# Altium PCB ZYNQ-HS-DEV-PCB.PcbDoc (part 1 of 10)
Units mm, origin at the board's own origin, x right, y up, seen from the top; angles counter-clockwise.
Board outline 125.25 x 111 mm, 10 copper layers (S1 (SIG), S2 (GND), S3 (SIG), S4 (GND), S5 (PWR), S6 (SIG), S7 (GND), S8 (SIG), S9 (GND), S10 (SIG)), stack 1.597 mm thick; 539 components, 408 nets, 2443 pads, 876 vias.
Unrouted connection lines stored in the file: 1310.
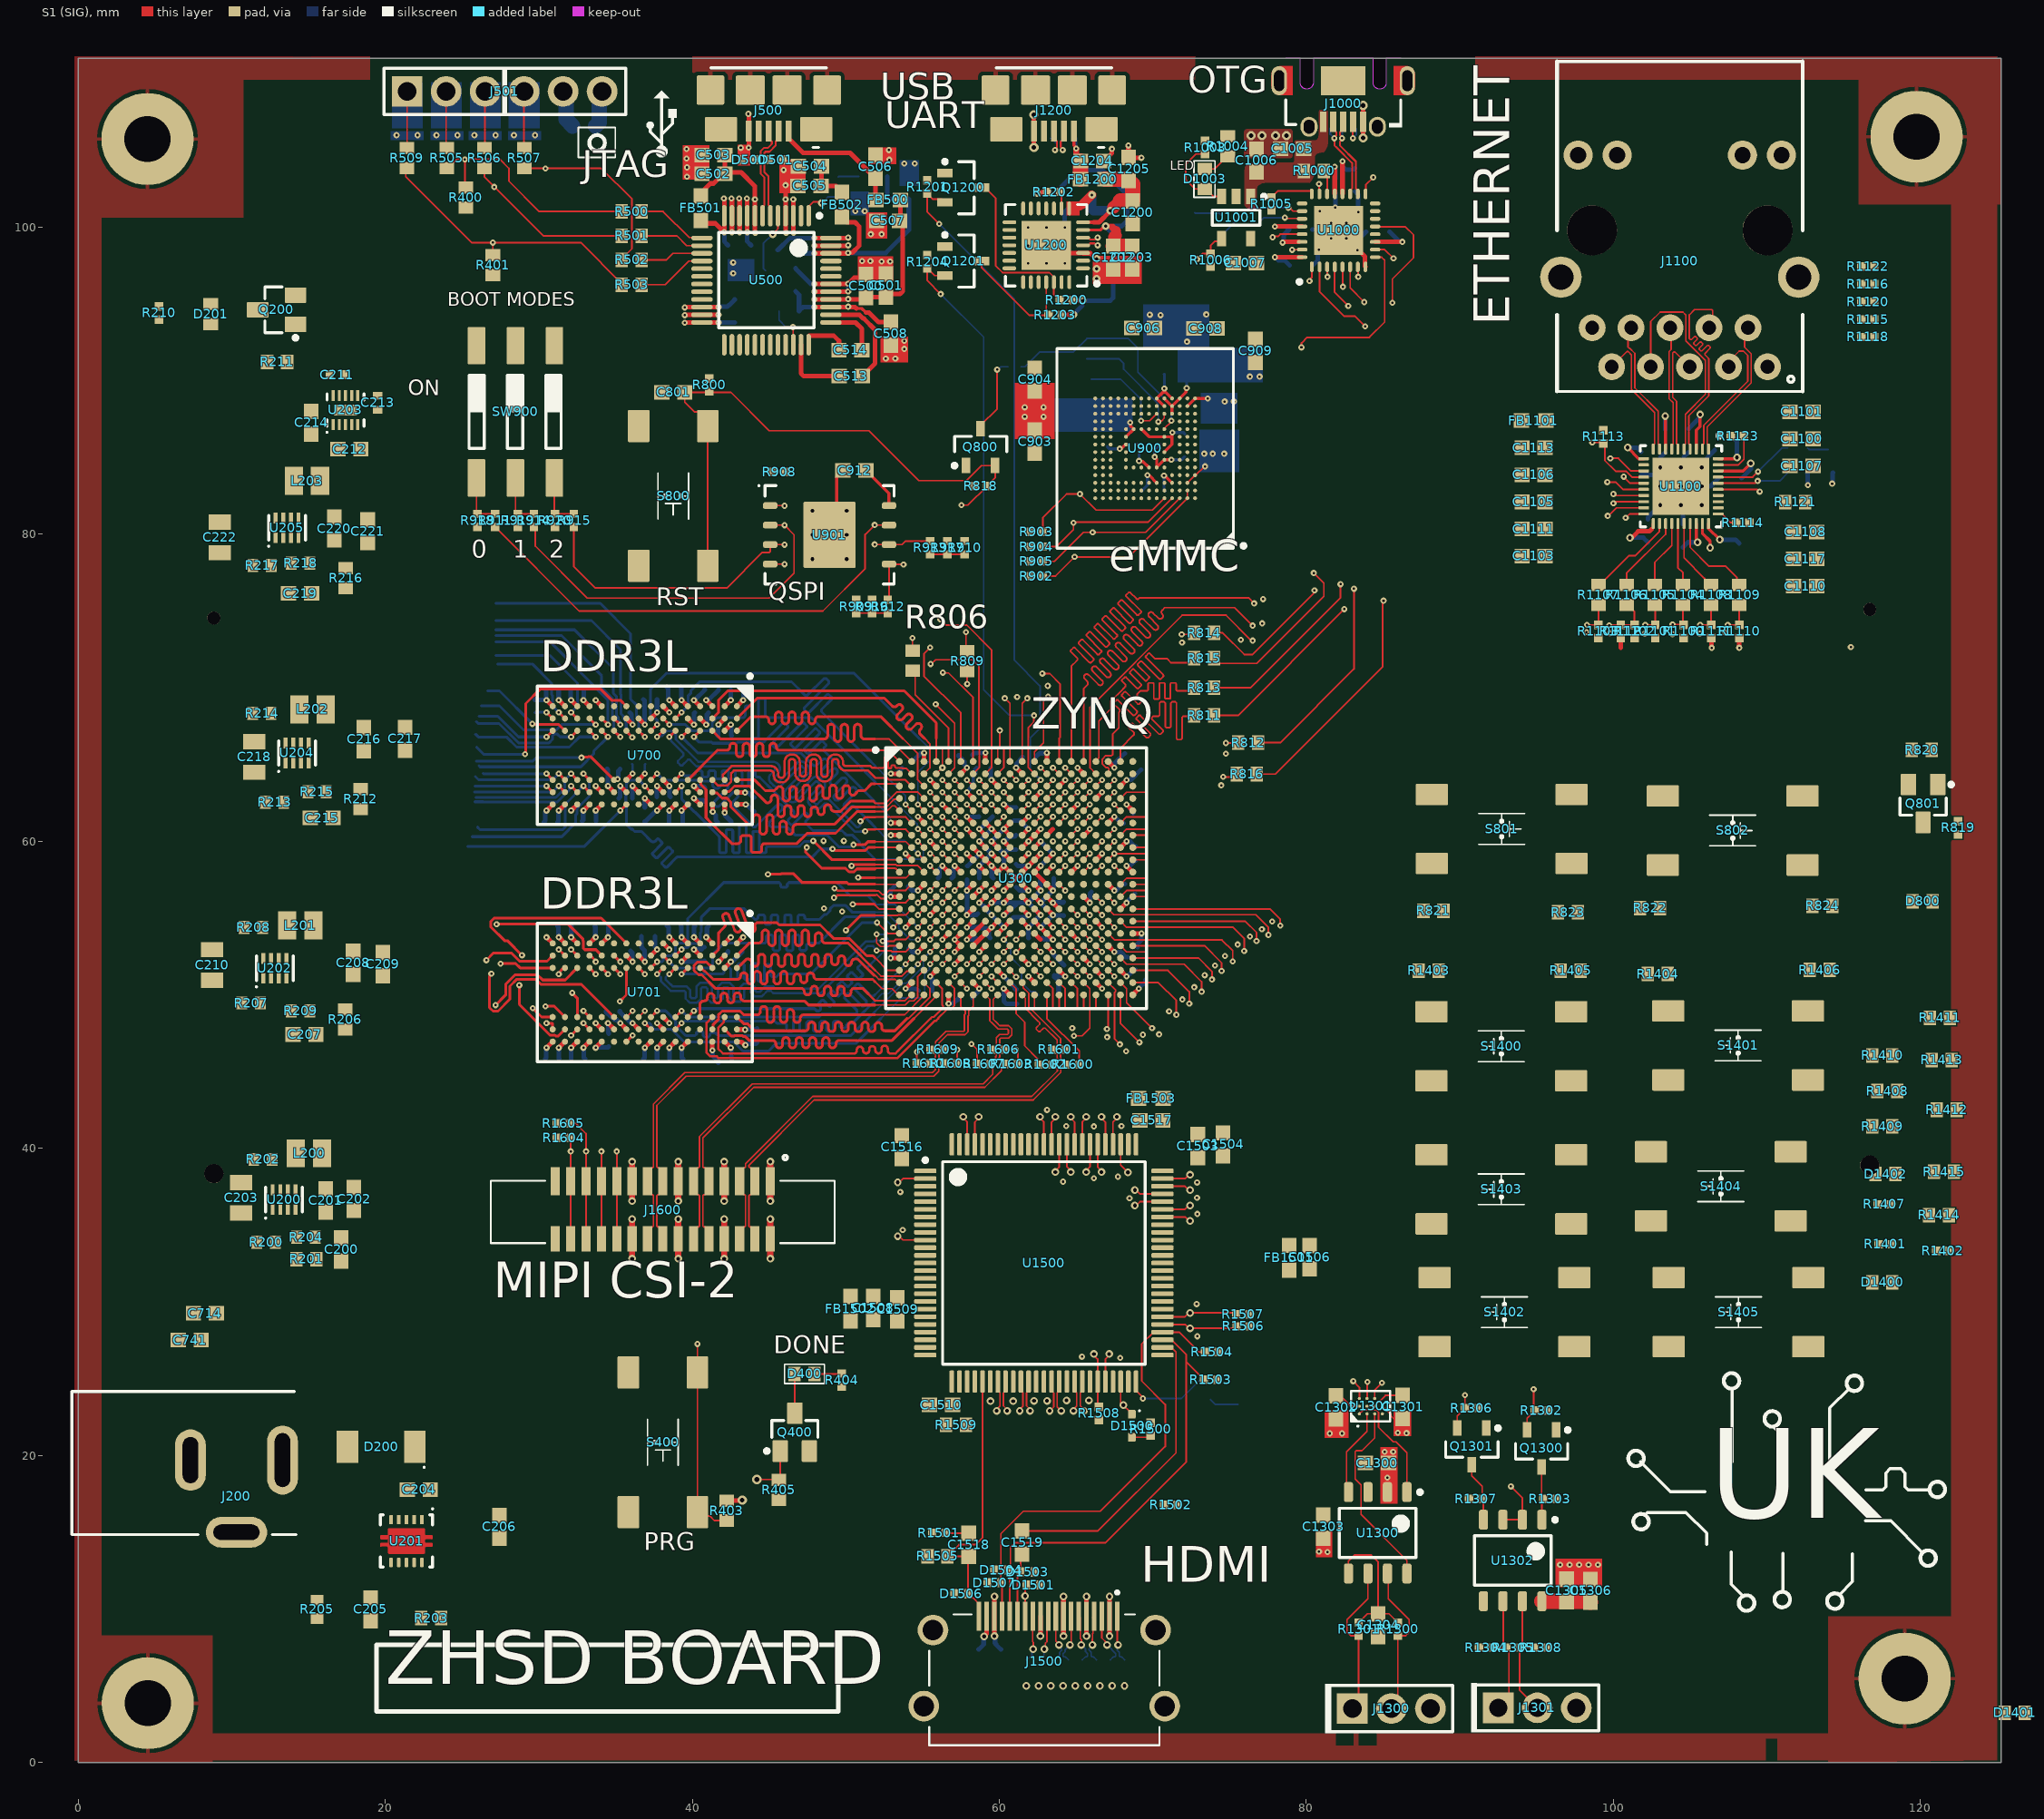
[diagram p0: S1 (SIG) view]
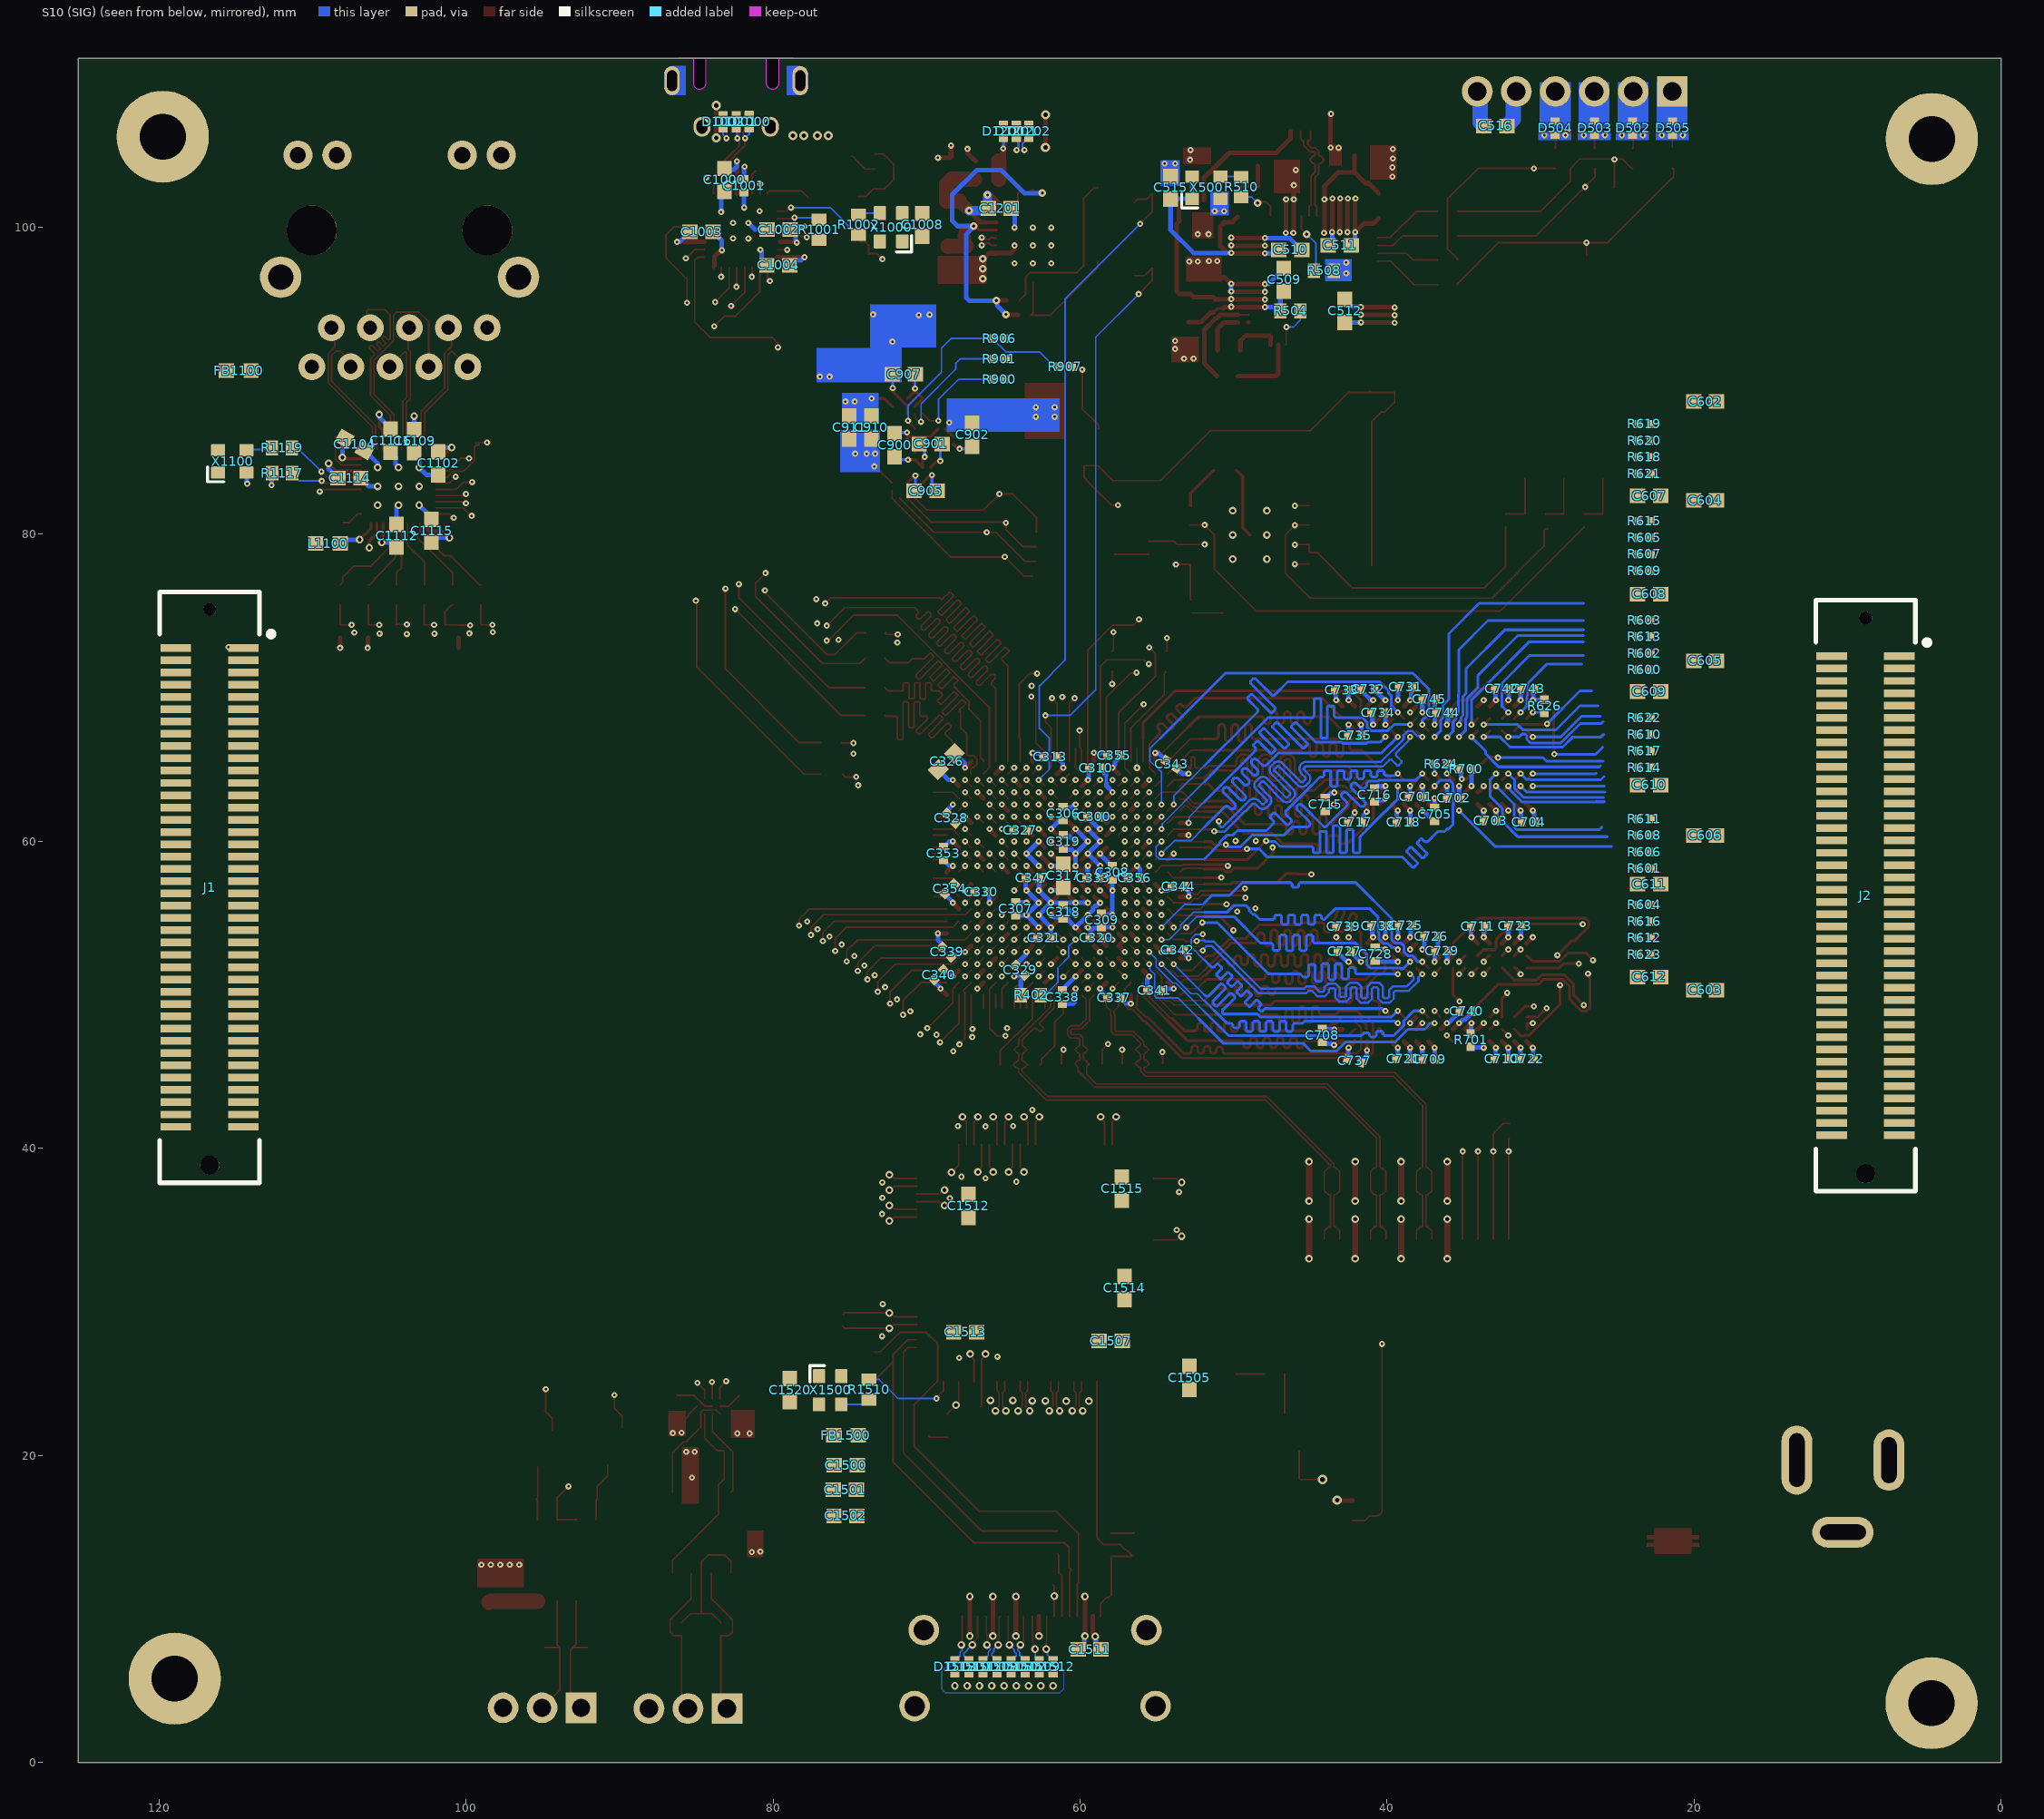
[diagram p1: S10 (SIG) view, seen from below]
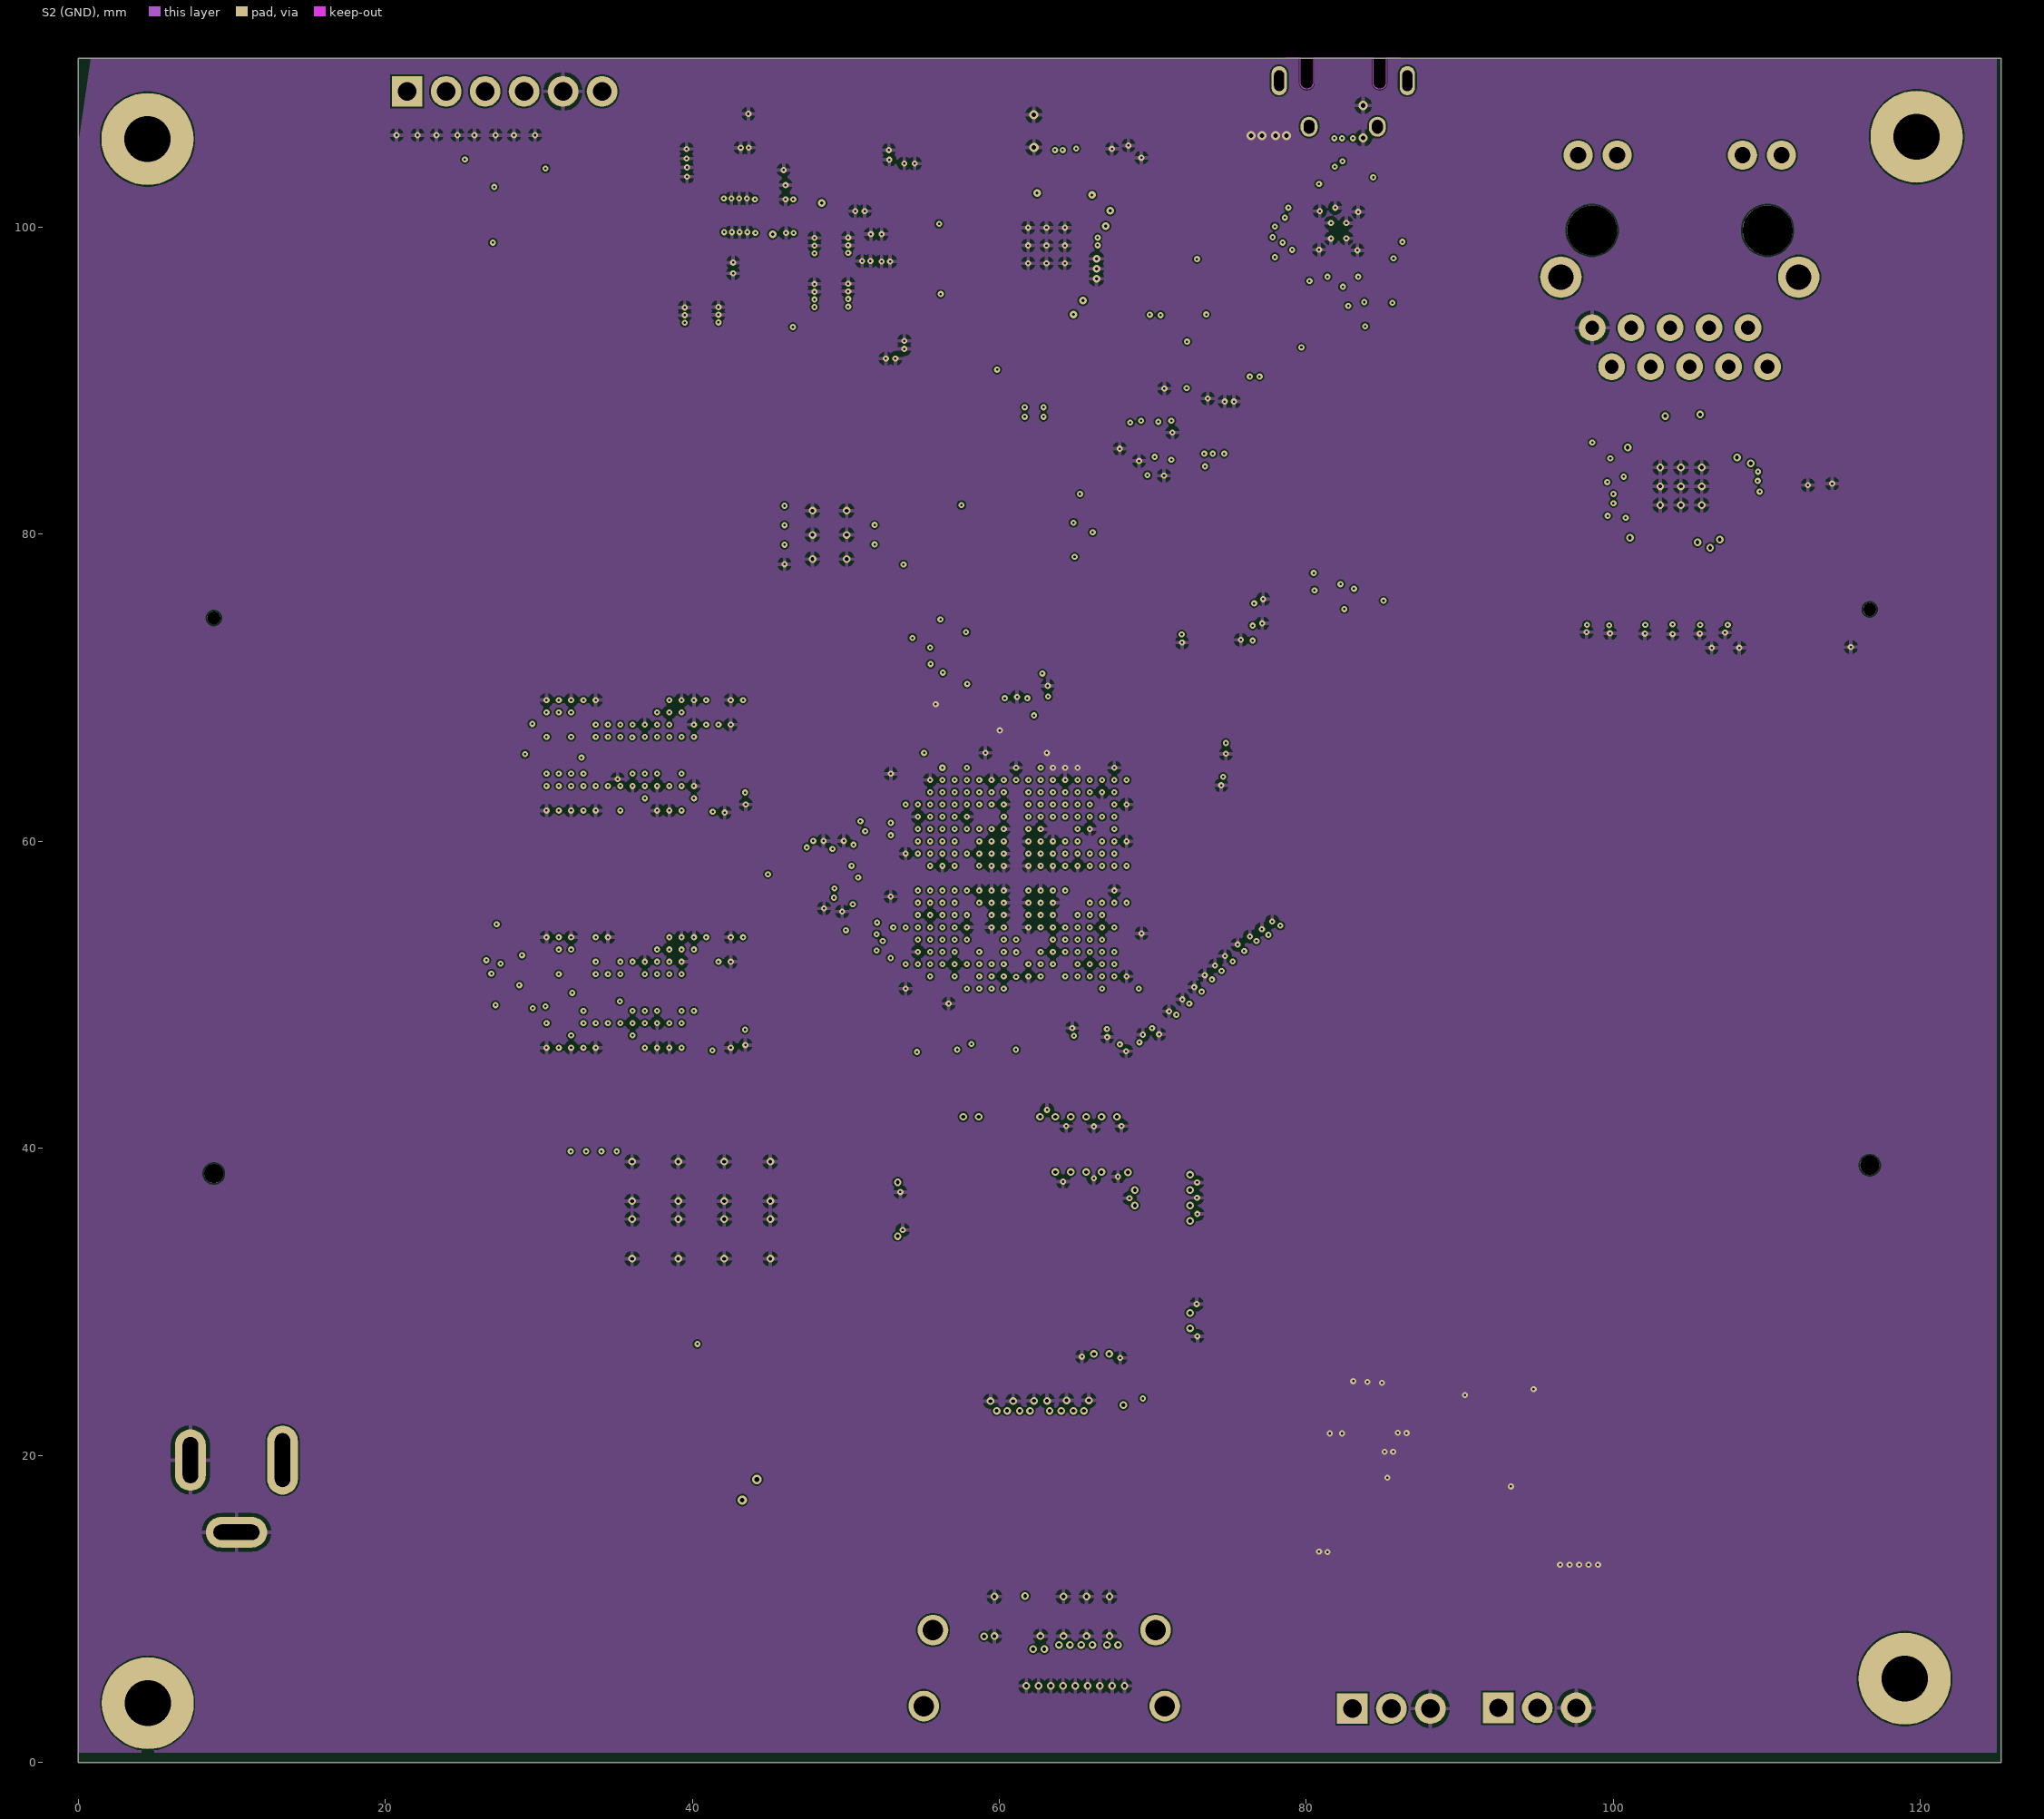
[diagram p2: S2 (GND)]
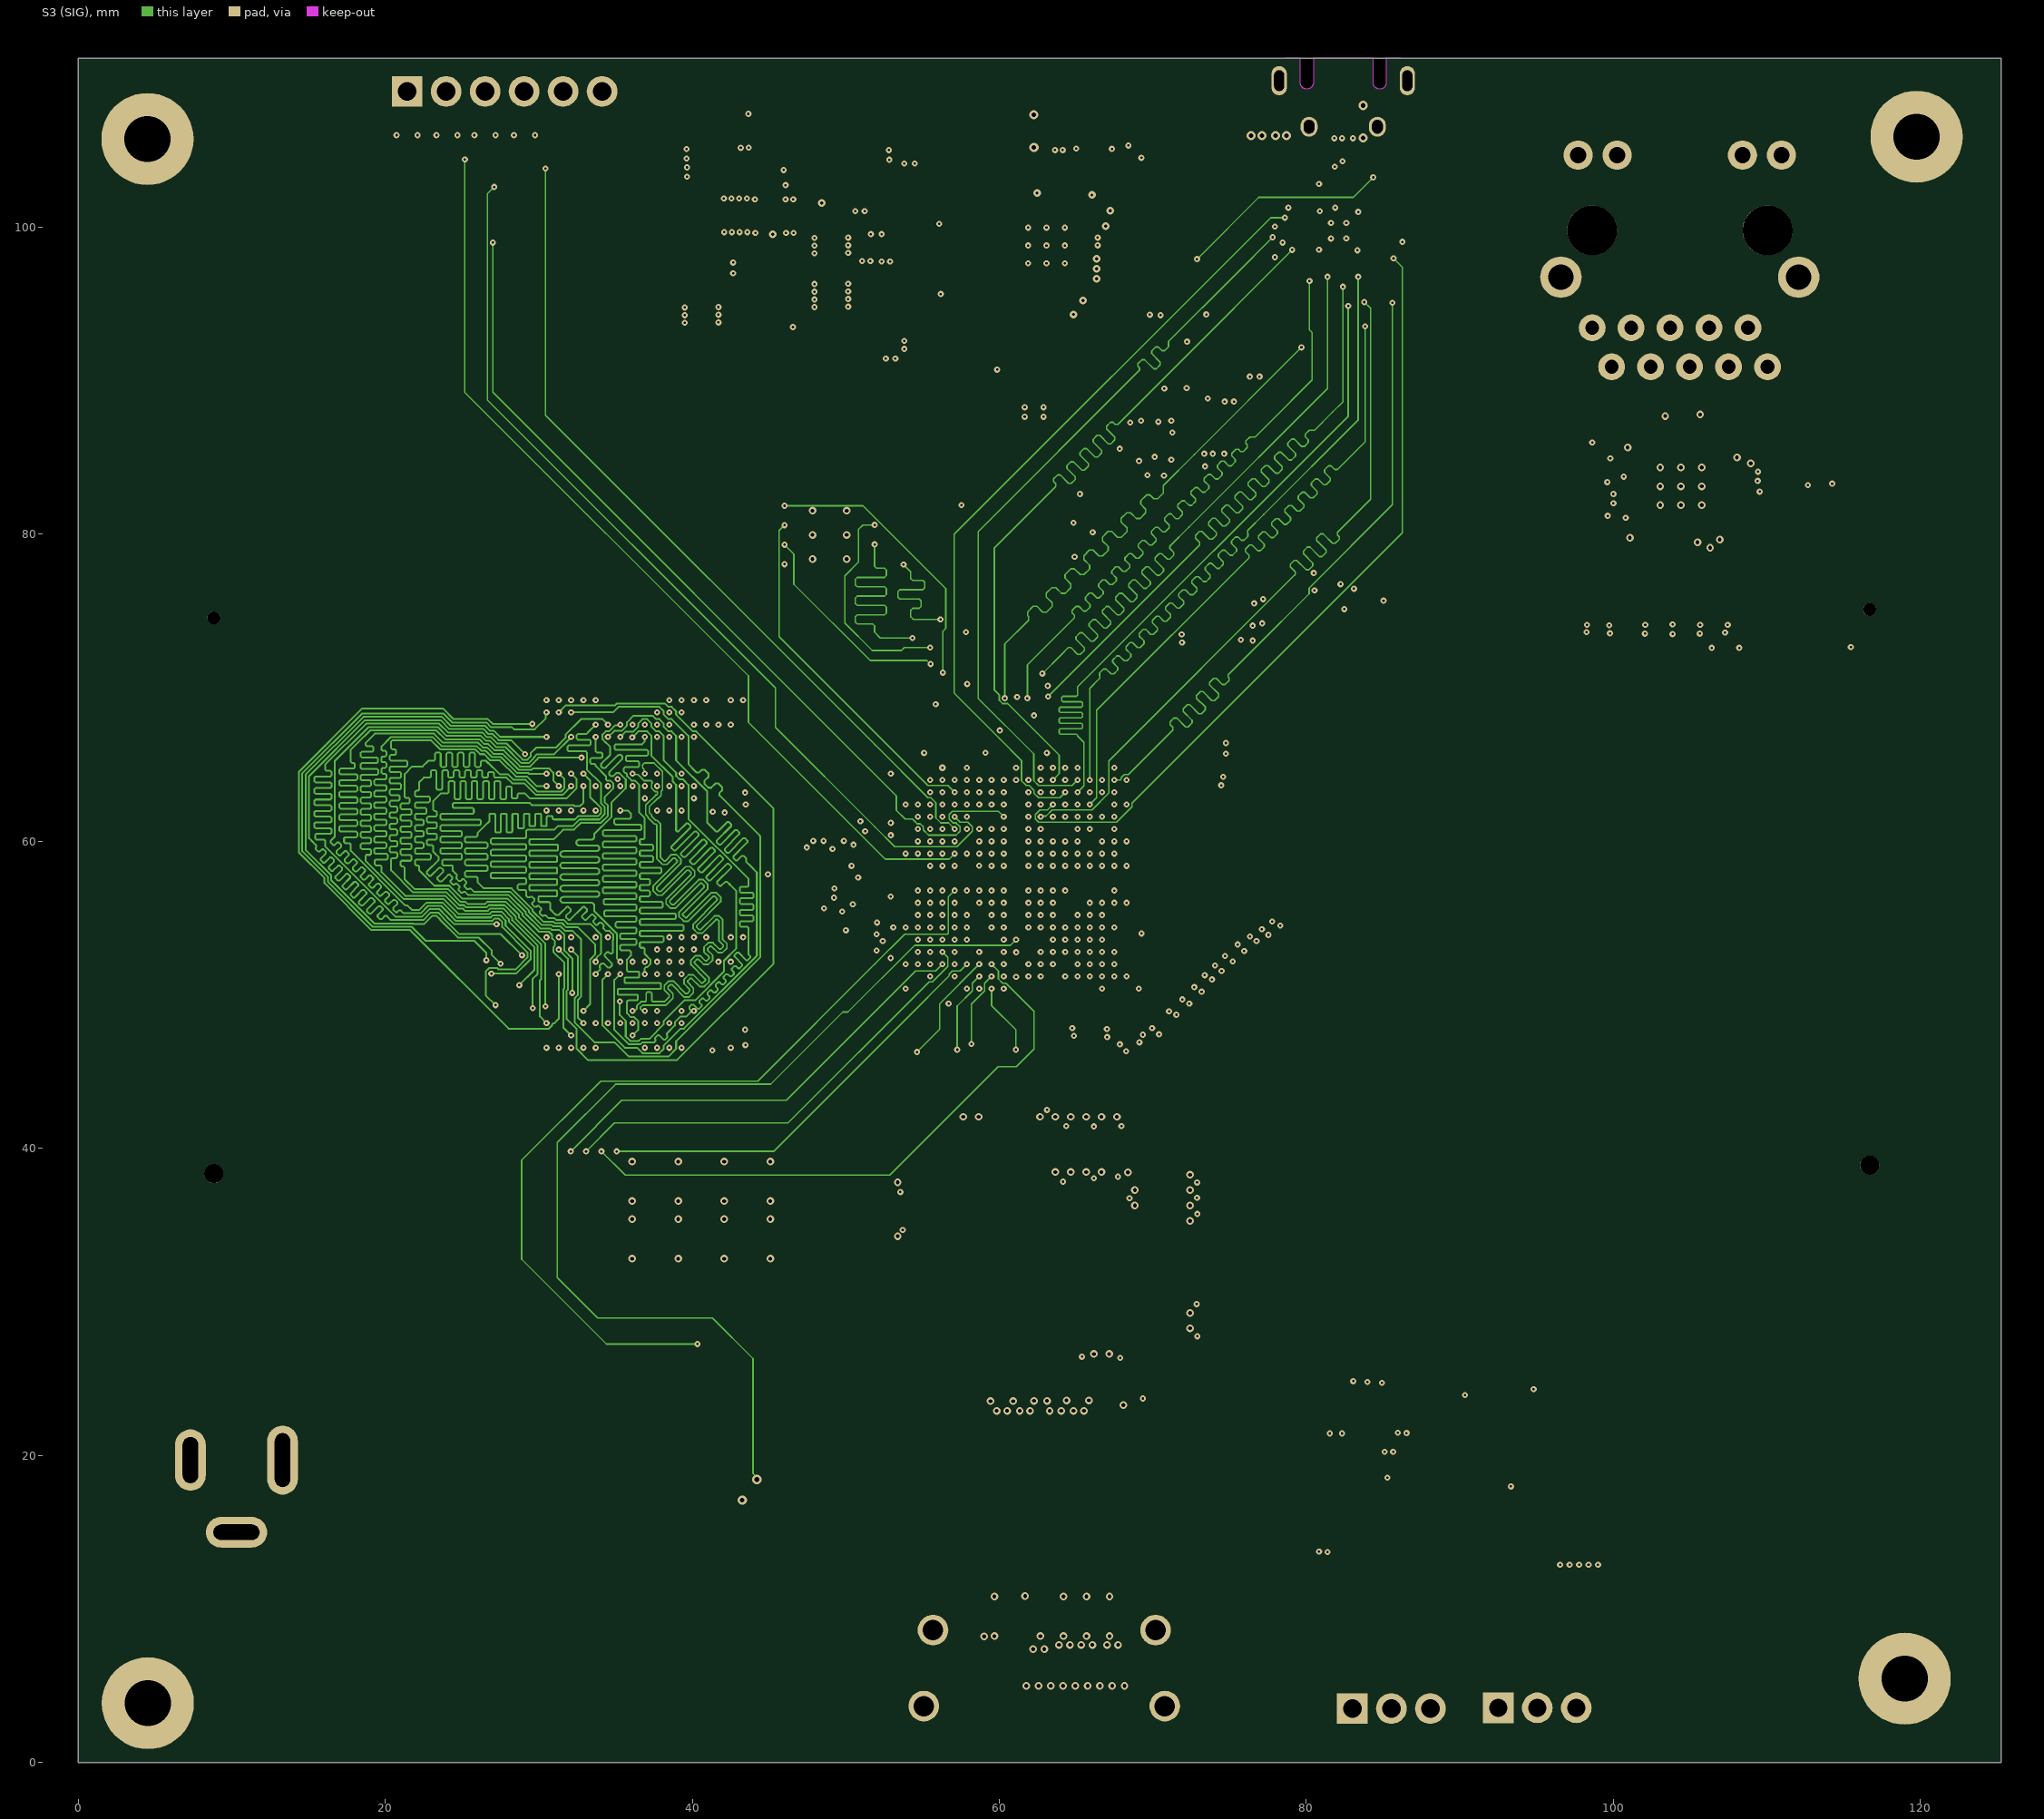
[diagram p3: S3 (SIG)]
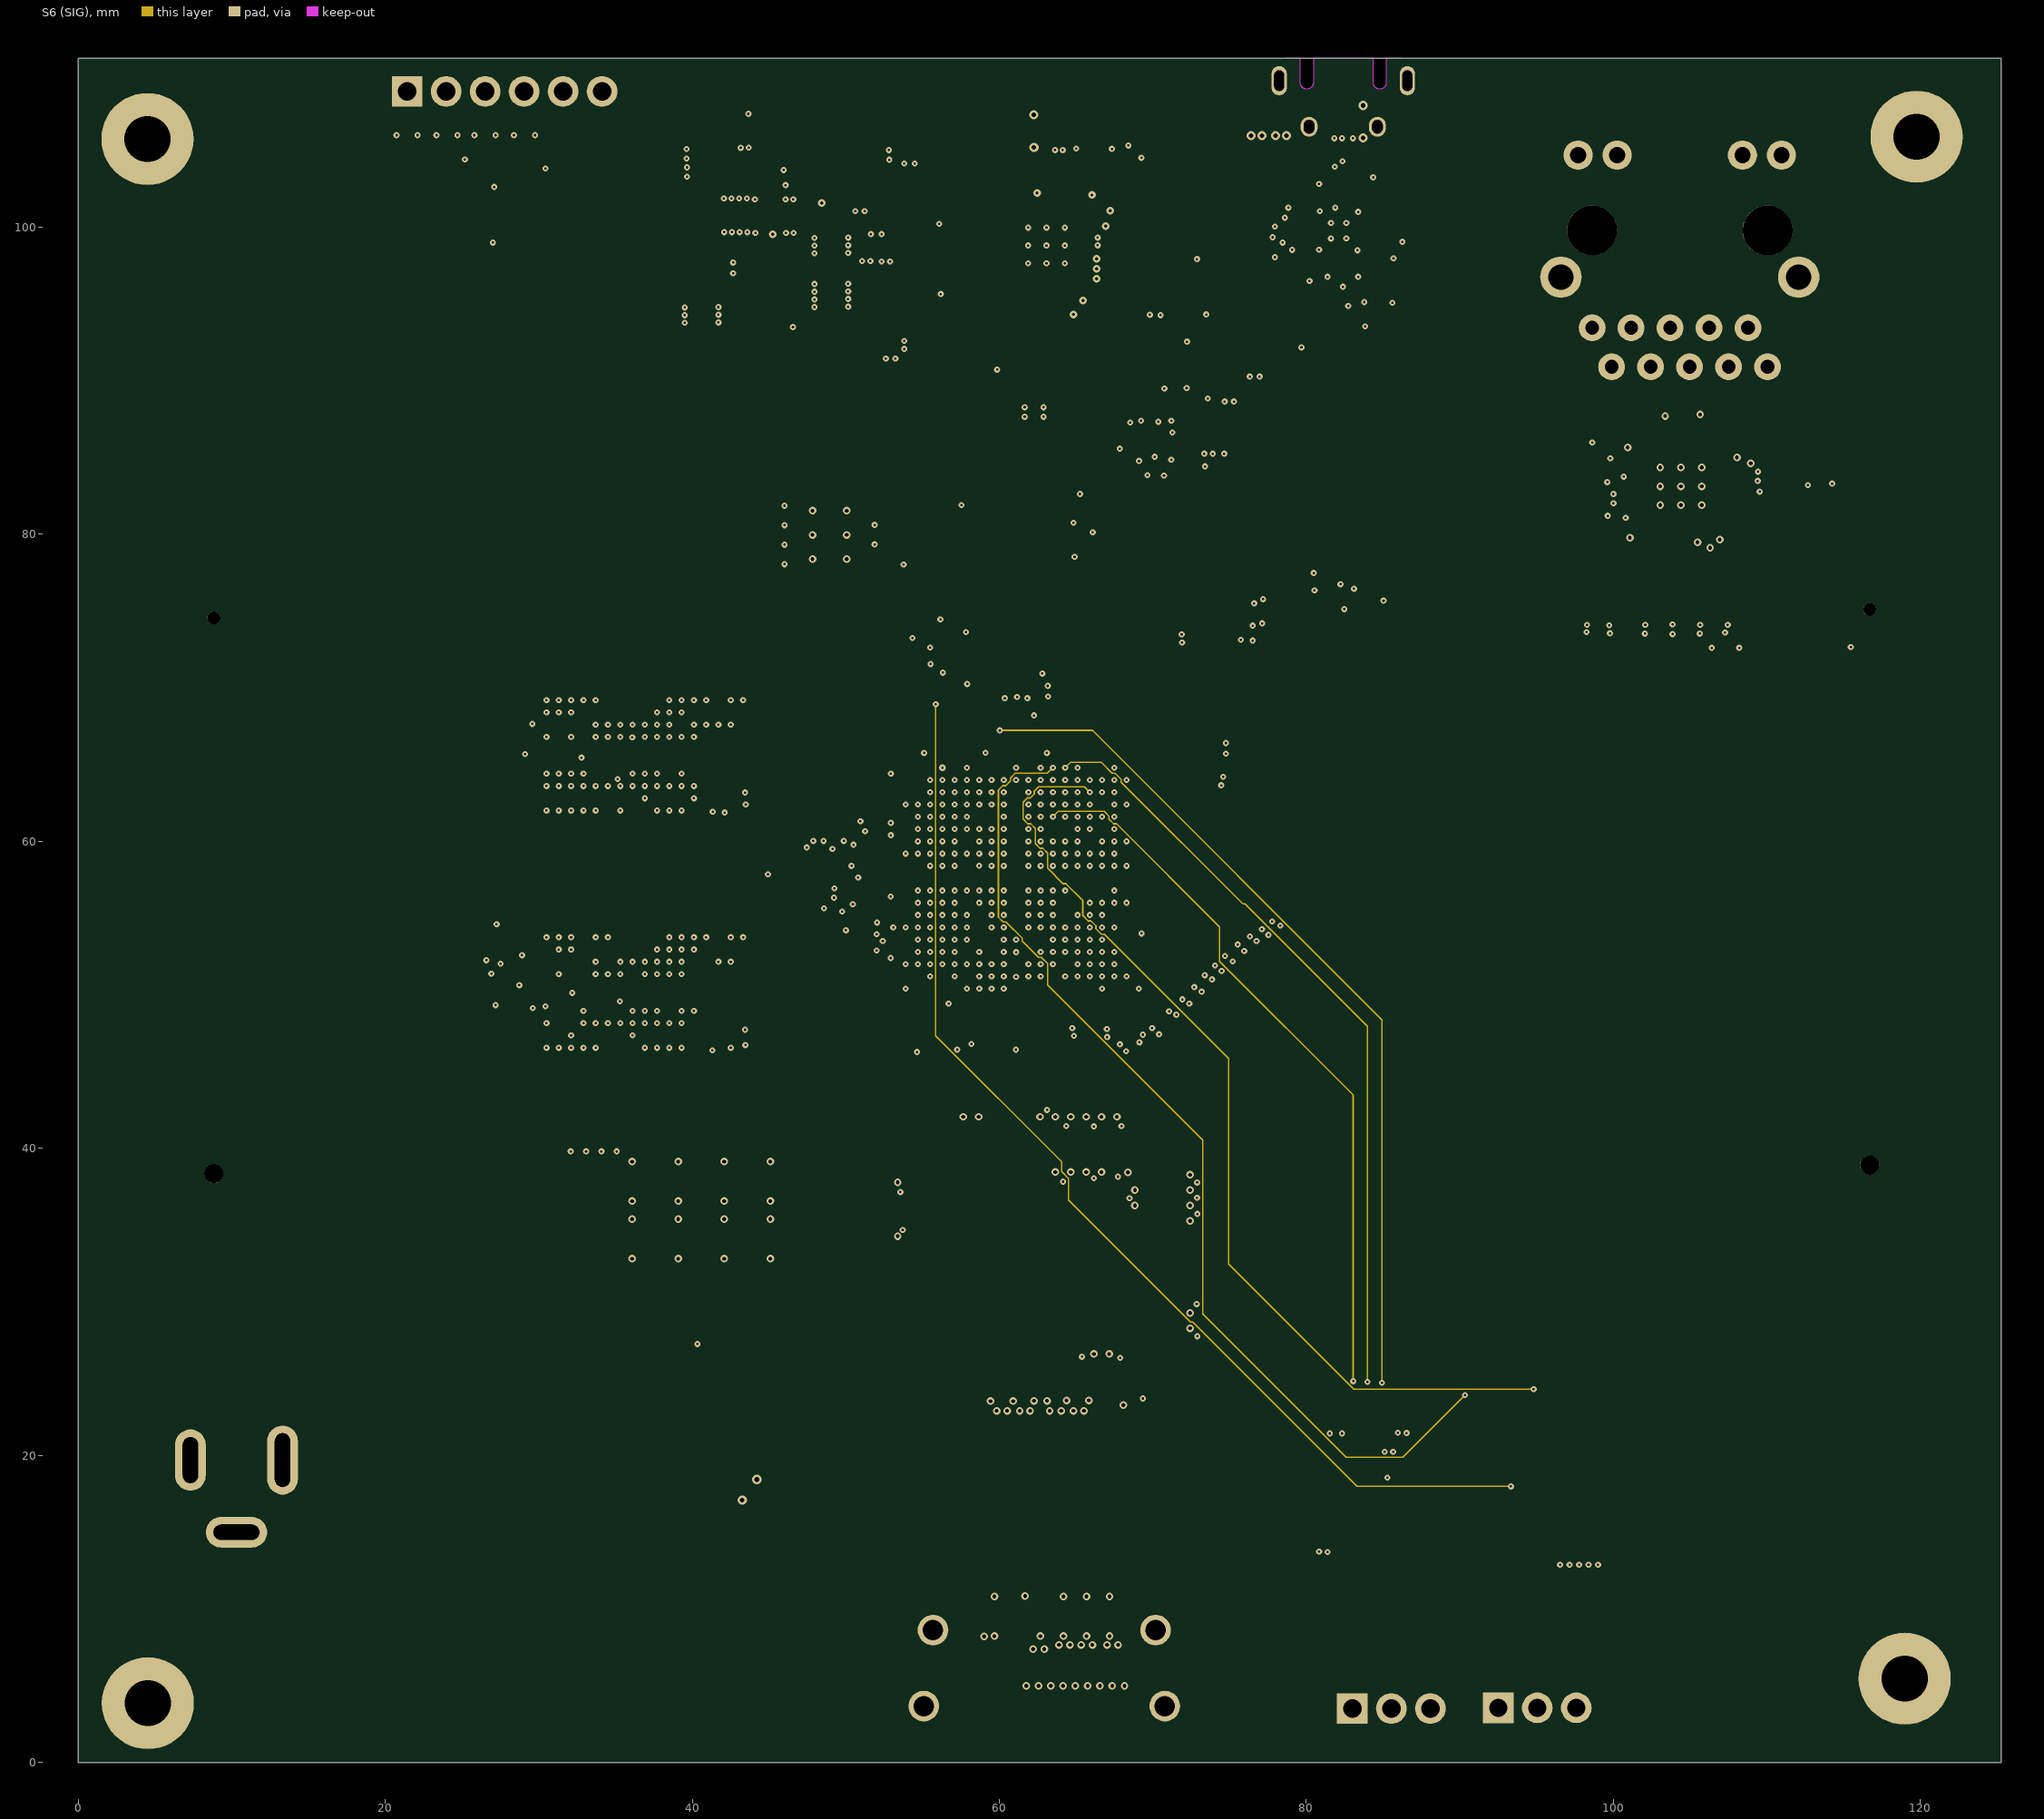
[diagram p4: S6 (SIG)]
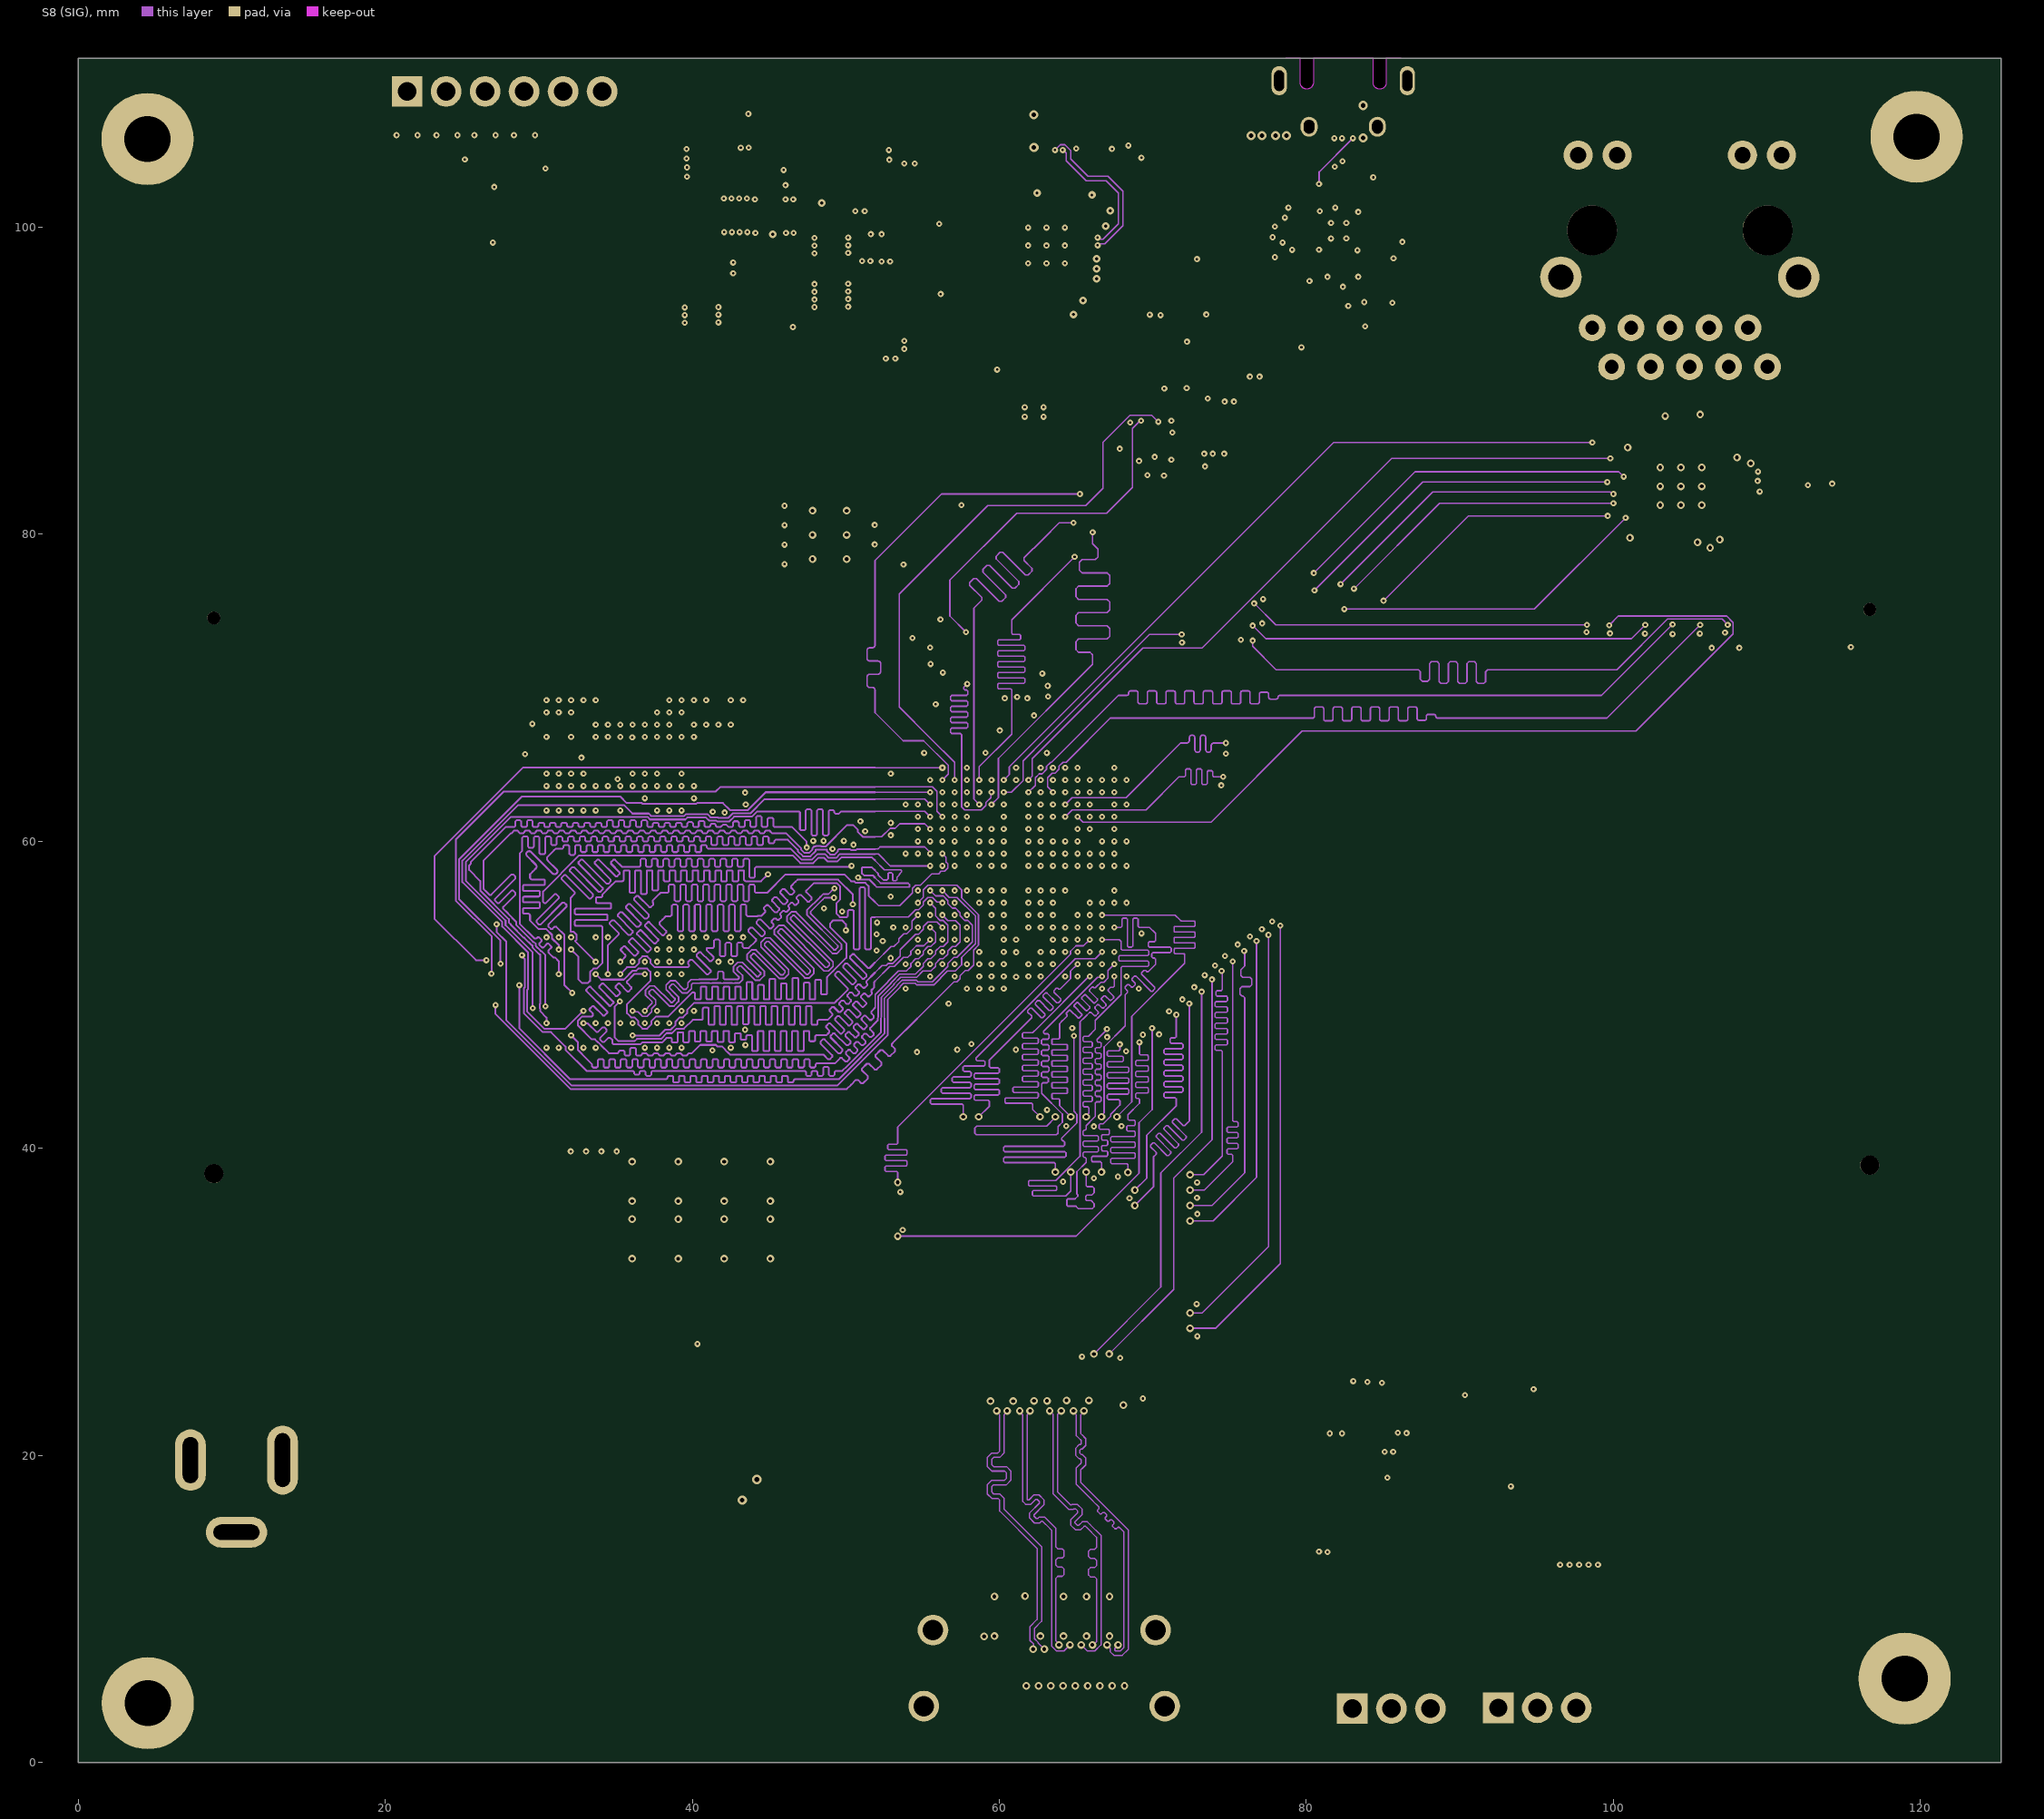
[diagram p5: S8 (SIG)]
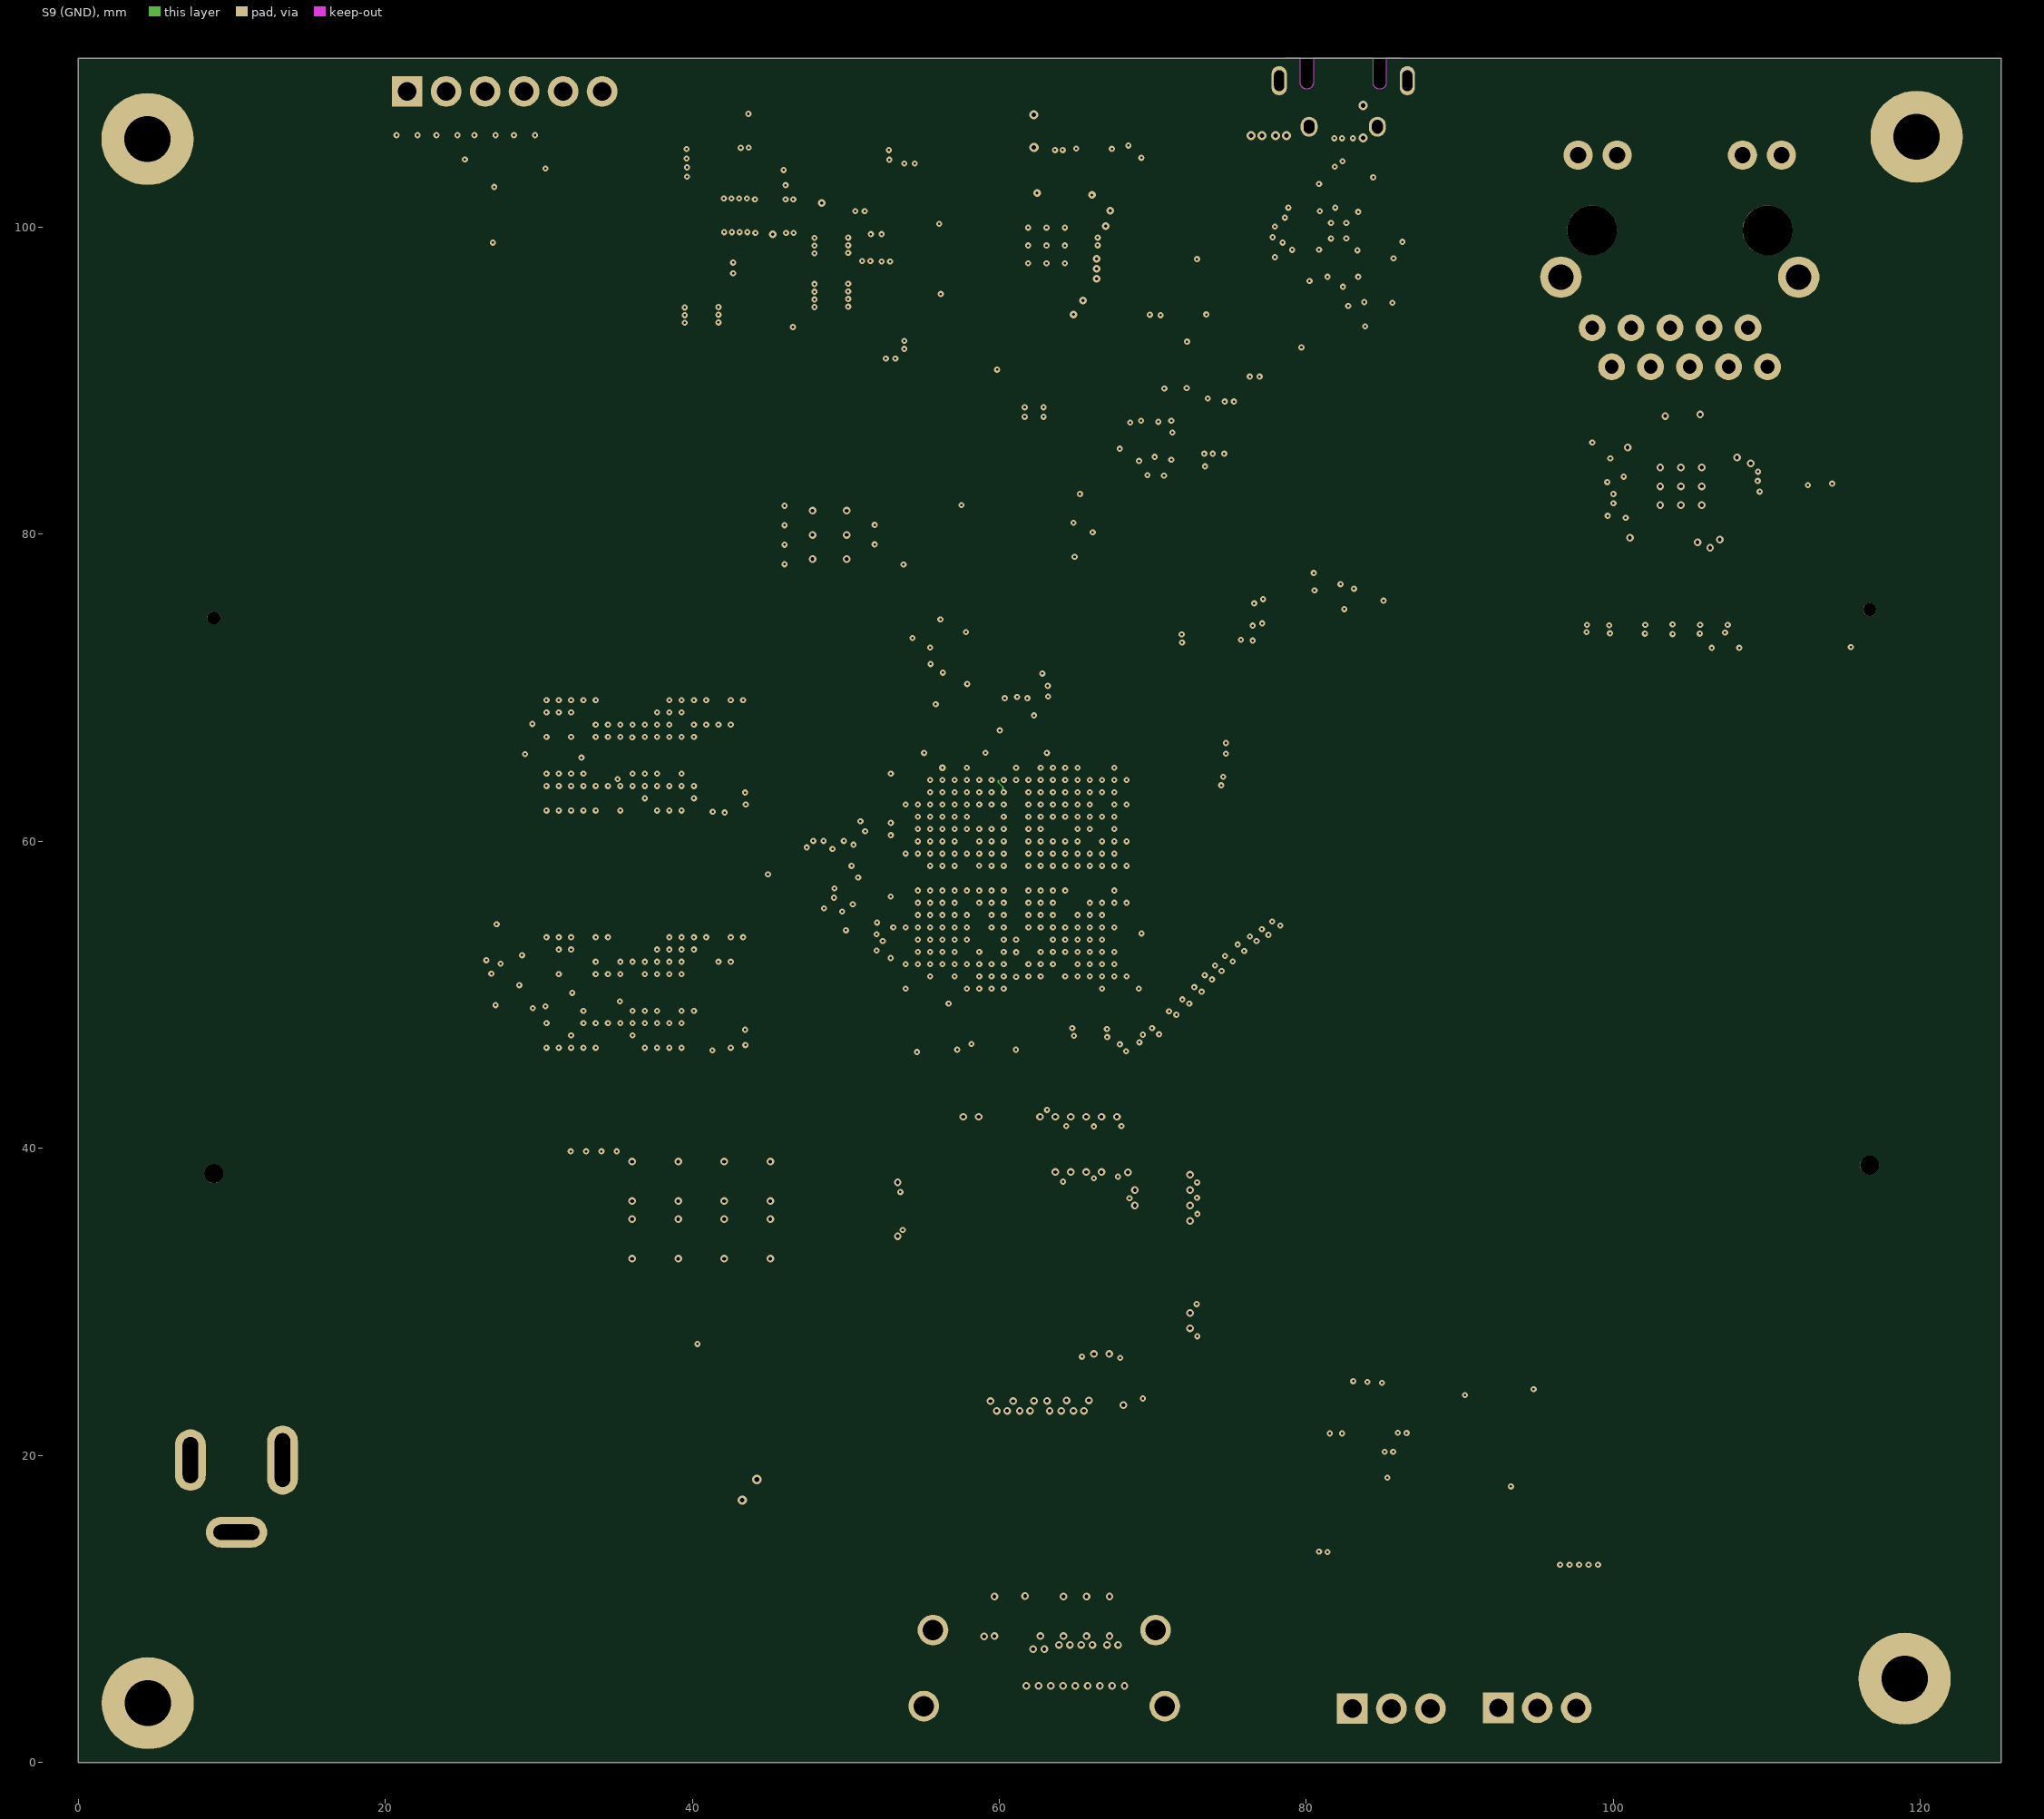
[diagram p6: S9 (GND)]

## Layer stack, top to bottom
Top Solder: solder mask 0.0102, Solder Resist, Dk 3.5
S1 (SIG): signal copper 0.035
Dielectric 2: prepreg 0.0784, PP-008, Dk 4.1
S2 (GND): signal copper 0.0152
Dielectric 4: core 0.075, Core-005, Dk 4.2
S3 (SIG): signal copper 0.0152
Dielectric 6: prepreg 0.0784, PP-006, Dk 4.1
Dielectric 10: prepreg 0.0784, PP-006, Dk 4.1
S4 (GND): signal copper 0.0152
Dielectric 8: core 0.075, Core-028, Dk 4.3
S5 (PWR): signal copper 0.0152
Dielectric 12: prepreg 0.2083, PP-022, Dk 4.5
Dielectric 1: prepreg 0.2184, PP-023, Dk 4.5
Dielectric 13: prepreg 0.2083, PP-022, Dk 4.5
S6 (SIG): signal copper 0.0152
Dielectric 9: core 0.075, Core-028, Dk 4.3
S7 (GND): signal copper 0.0152
Dielectric 11: prepreg 0.0784, PP-006, Dk 4.1
Dielectric 7: prepreg 0.0784, PP-006, Dk 4.1
S8 (SIG): signal copper 0.0152
Dielectric 5: core 0.075, Core-005, Dk 4.2
S9 (GND): signal copper 0.0152
Dielectric 3: prepreg 0.0784, PP-008, Dk 4.1
S10 (SIG): signal copper 0.035
Bottom Solder: solder mask 0.0102, Solder Resist, Dk 3.5

## Board outline
0,111 125.25,111 125.25,0 0,0

## Design rules (kind name [scope] priority, off if disabled: settings)
Clearance [All] p1: gap=0.1 ignorepadtopadclearanceinfootprint=FALSE
DiffPairsRouting "Schematic Differential Pairs Routing" [InDifferentialPairClass('MIPI')] p1: maxlimit=0.254 minlimit=0.127 mostfreqgap=0.254 toplayer_maxgap=0.127 toplayer_prefgap=0.127 toplayer_minwidth=0.1 toplayer_maxwidth=0.1 toplayer_prefwidth=0.1 midlayer2_mingap=0.2 midlayer2_maxgap=0.2 midlayer2_prefgap=0.2 midlayer2_minwidth=0.09 midlayer2_maxwidth=0.09 midlayer2_prefwidth=0.09 midlayer4_mingap=0.254 midlayer4_minwidth=0.1 midlayer4_maxwidth=0.1 midlayer4_prefwidth=0.1 midlayer5_mingap=0.254 midlayer5_minwidth=0.1 midlayer5_maxwidth=0.1 midlayer5_prefwidth=0.1 midlayer7_mingap=0.2 midlayer7_maxgap=0.2 midlayer7_prefgap=0.2 midlayer7_minwidth=0.09 midlayer7_maxwidth=0.09 midlayer7_prefwidth=0.09 bottomlayer_maxgap=0.127 bottomlayer_prefgap=0.127 bottomlayer_minwidth=0.1 bottomlayer_maxwidth=0.1 bottomlayer_prefwidth=0.1 impedanceprofiledriven=TRUE impedanceprofileid={97E10FFF-A952-4F68-939C-B2FAAB23D514} impedanceprofilevalue=100.000000 maxuncoupledlength=12.7
DiffPairsRouting USB [InDifferentialPairClass('USB')] p2: maxlimit=0.2 minlimit=0.127 mostfreqgap=0.16 toplayer_maxgap=0.127 toplayer_prefgap=0.127 toplayer_minwidth=0.121 toplayer_maxwidth=0.121 toplayer_prefwidth=0.121 midlayer2_mingap=0.2 midlayer2_prefgap=0.2 midlayer2_minwidth=0.1 midlayer2_maxwidth=0.1 midlayer2_prefwidth=0.1 midlayer4_mingap=0.16 midlayer4_maxgap=0.16 midlayer4_minwidth=0.1 midlayer4_maxwidth=0.1 midlayer4_prefwidth=0.1 midlayer5_mingap=0.16 midlayer5_maxgap=0.16 midlayer5_minwidth=0.1 midlayer5_maxwidth=0.1 midlayer5_prefwidth=0.1 midlayer7_mingap=0.2 midlayer7_prefgap=0.2 midlayer7_minwidth=0.1 midlayer7_maxwidth=0.1 midlayer7_prefwidth=0.1 bottomlayer_maxgap=0.127 bottomlayer_prefgap=0.127 bottomlayer_minwidth=0.121 bottomlayer_maxwidth=0.121 bottomlayer_prefwidth=0.121 impedanceprofiledriven=TRUE impedanceprofileid={B4343022-A5A5-4748-9A27-A23D4C171444} impedanceprofilevalue=90.000000 maxuncoupledlength=12.7
DiffPairsRouting HDMI [InDifferentialPairClass('HDMI_DIFF')] p3: maxlimit=0.254 minlimit=0.127 mostfreqgap=0.254 toplayer_maxgap=0.127 toplayer_prefgap=0.127 toplayer_minwidth=0.1 toplayer_maxwidth=0.1 toplayer_prefwidth=0.1 midlayer2_mingap=0.2 midlayer2_maxgap=0.2 midlayer2_prefgap=0.2 midlayer2_minwidth=0.09 midlayer2_maxwidth=0.09 midlayer2_prefwidth=0.09 midlayer4_mingap=0.254 midlayer4_minwidth=0.1 midlayer4_maxwidth=0.1 midlayer4_prefwidth=0.1 midlayer5_mingap=0.254 midlayer5_minwidth=0.1 midlayer5_maxwidth=0.1 midlayer5_prefwidth=0.1 midlayer7_mingap=0.2 midlayer7_maxgap=0.2 midlayer7_prefgap=0.2 midlayer7_minwidth=0.09 midlayer7_maxwidth=0.09 midlayer7_prefwidth=0.09 bottomlayer_maxgap=0.127 bottomlayer_prefgap=0.127 bottomlayer_minwidth=0.1 bottomlayer_maxwidth=0.1 bottomlayer_prefwidth=0.1 impedanceprofiledriven=TRUE impedanceprofileid={97E10FFF-A952-4F68-939C-B2FAAB23D514} impedanceprofilevalue=100.000000 maxuncoupledlength=12.7
DiffPairsRouting GiE [InDifferentialPairClass('GiE')] p4: maxlimit=0.254 minlimit=0.127 mostfreqgap=0.254 toplayer_maxgap=0.127 toplayer_prefgap=0.127 toplayer_minwidth=0.1 toplayer_maxwidth=0.1 toplayer_prefwidth=0.1 midlayer2_mingap=0.2 midlayer2_maxgap=0.2 midlayer2_prefgap=0.2 midlayer2_minwidth=0.09 midlayer2_maxwidth=0.09 midlayer2_prefwidth=0.09 midlayer4_mingap=0.254 midlayer4_minwidth=0.1 midlayer4_maxwidth=0.1 midlayer4_prefwidth=0.1 midlayer5_mingap=0.254 midlayer5_minwidth=0.1 midlayer5_maxwidth=0.1 midlayer5_prefwidth=0.1 midlayer7_mingap=0.2 midlayer7_maxgap=0.2 midlayer7_prefgap=0.2 midlayer7_minwidth=0.09 midlayer7_maxwidth=0.09 midlayer7_prefwidth=0.09 bottomlayer_maxgap=0.127 bottomlayer_prefgap=0.127 bottomlayer_minwidth=0.1 bottomlayer_maxwidth=0.1 bottomlayer_prefwidth=0.1 impedanceprofiledriven=TRUE impedanceprofileid={97E10FFF-A952-4F68-939C-B2FAAB23D514} impedanceprofilevalue=100.000000 maxuncoupledlength=12.7
DiffPairsRouting BGA_Diff [WithinRoom('ZYNQ_BGA')] p5: maxlimit=0.254 minlimit=0.127 mostfreqgap=0.16 toplayer_maxgap=0.127 toplayer_prefgap=0.127 toplayer_minwidth=0.121 toplayer_maxwidth=0.121 toplayer_prefwidth=0.121 midlayer2_mingap=0.2 midlayer2_maxgap=0.2 midlayer2_prefgap=0.2 midlayer2_minwidth=0.1 midlayer2_maxwidth=0.1 midlayer2_prefwidth=0.1 midlayer4_mingap=0.16 midlayer4_maxgap=0.16 midlayer4_minwidth=0.1 midlayer4_maxwidth=0.1 midlayer4_prefwidth=0.1 midlayer5_mingap=0.16 midlayer5_maxgap=0.16 midlayer5_minwidth=0.1 midlayer5_maxwidth=0.1 midlayer5_prefwidth=0.1 midlayer7_mingap=0.2 midlayer7_maxgap=0.2 midlayer7_prefgap=0.2 midlayer7_minwidth=0.1 midlayer7_maxwidth=0.1 midlayer7_prefwidth=0.1 bottomlayer_maxgap=0.127 bottomlayer_prefgap=0.127 bottomlayer_minwidth=0.121 bottomlayer_maxwidth=0.121 bottomlayer_prefwidth=0.121 impedanceprofiledriven=TRUE impedanceprofileid={B4343022-A5A5-4748-9A27-A23D4C171444} impedanceprofilevalue=90.000000 maxuncoupledlength=12.7
DiffPairsRouting [All] p6: maxlimit=0.254 minlimit=0.254 mostfreqgap=0.254 toplayer_minwidth=0.381 toplayer_maxwidth=0.381 toplayer_prefwidth=0.381 midlayer1_minwidth=0.381 midlayer1_maxwidth=0.381 midlayer1_prefwidth=0.381 midlayer2_minwidth=0.381 midlayer2_maxwidth=0.381 midlayer2_prefwidth=0.381 midlayer3_minwidth=0.381 midlayer3_maxwidth=0.381 midlayer3_prefwidth=0.381 midlayer4_minwidth=0.381 midlayer4_maxwidth=0.381 midlayer4_prefwidth=0.381 midlayer5_minwidth=0.381 midlayer5_maxwidth=0.381 midlayer5_prefwidth=0.381 midlayer6_minwidth=0.381 midlayer6_maxwidth=0.381 midlayer6_prefwidth=0.381 midlayer7_minwidth=0.381 midlayer7_maxwidth=0.381 midlayer7_prefwidth=0.381 midlayer8_minwidth=0.381 midlayer8_maxwidth=0.381 midlayer8_prefwidth=0.381 bottomlayer_minwidth=0.381 bottomlayer_maxwidth=0.381 bottomlayer_prefwidth=0.381 maxuncoupledlength=12.7
HoleSize [All] p1: absolutevalues=TRUE maxlimit=5 minlimit=0.025 maxpercent=80.000 minpercent=20.000
MatchedLengths "Schematic Matched Net Lengths" [InNetClass('eMMC')] p1: tolerance=25.4 checknetsindiffpair=FALSE checkdiffpairvsdiffpair=TRUE checkxsignals=TRUE checkothers=TRUE usedelayunits=TRUE delaytolerance=50.000000
MatchedLengths QSPI [InNetClass('QSPI')] p2: tolerance=25.4 checknetsindiffpair=FALSE checkdiffpairvsdiffpair=TRUE checkxsignals=TRUE checkothers=TRUE usedelayunits=TRUE delaytolerance=50.000000
MatchedLengths USB_ULPI [InNetClass('USB_ULPI')] p3: tolerance=25.4 checknetsindiffpair=FALSE checkdiffpairvsdiffpair=TRUE checkxsignals=TRUE checkothers=TRUE usedelayunits=TRUE delaytolerance=10.000000
MatchedLengths HDMI_DATA [InNetClass('HDMI_DATA')] p4 off: tolerance=25.4 checknetsindiffpair=FALSE checkdiffpairvsdiffpair=TRUE checkxsignals=TRUE checkothers=TRUE usedelayunits=TRUE delaytolerance=10.000000
MatchedLengths MatchedLengths_ETH_RX_2 [InxSignalClass('ETH_RX_PP2')] p5 off: tolerance=25.4 checknetsindiffpair=FALSE checkdiffpairvsdiffpair=TRUE checkxsignals=TRUE checkothers=TRUE usedelayunits=TRUE delaytolerance=10.000000
MatchedLengths MatchedLengths_ETH_RX [InxSignalClass('ETH_RX_PP1')] p6 off: tolerance=25.4 checknetsindiffpair=FALSE checkdiffpairvsdiffpair=TRUE checkxsignals=TRUE checkothers=TRUE usedelayunits=TRUE delaytolerance=10.000000 targetsourcename=ETH.RXCLK_PP1
MatchedLengths MatchedLengths_ETH_TX [InxSignalClass('ETH_TX_PP2')] p7 off: tolerance=25.4 checknetsindiffpair=FALSE checkdiffpairvsdiffpair=TRUE checkxsignals=TRUE checkothers=TRUE usedelayunits=TRUE delaytolerance=10.000000 targetsourcename=ETH_PS_TX_CLK-ETH.TXCLK_PP1
MatchedLengths MatchedLengths_ETH_TX_1 [InxSignalClass('ETH_TX_PP1')] p8 off: tolerance=25.4 checknetsindiffpair=FALSE checkdiffpairvsdiffpair=TRUE checkxsignals=TRUE checkothers=TRUE usedelayunits=TRUE delaytolerance=10.000000 targetsourcename=ETH_PS_TX_CLK_PP1
MatchedLengths MatchedLengths_DDR_CLOCKS_STROBES_3 [InxSignalClass('ADDR_PP1') OR InxSignalClass('ADDR_PP2') OR InxSignalClass('DATA_BL0') OR InxSignalClass('DATA_BL1') OR InxSignalClass('DATA_BL2') OR InxSignalClass('DATA_BL3')] p9 off: tolerance=0 checknetsindiffpair=TRUE checkdiffpairvsdiffpair=FALSE checkxsignals=FALSE checkothers=FALSE usedelayunits=TRUE delaytolerance=10.000000
MatchedLengths MatchedLengths_DATA_BL3_1 [InxSignalClass('DATA_BL3')] p10 off: tolerance=0 checknetsindiffpair=FALSE checkdiffpairvsdiffpair=TRUE checkxsignals=TRUE checkothers=TRUE usedelayunits=TRUE delaytolerance=10.000000 targetsourcename=DDR_DQS1_P_BL3_3
MatchedLengths MatchedLengths_DATA_BL2_2 [InxSignalClass('DATA_BL2')] p11 off: tolerance=0 checknetsindiffpair=FALSE checkdiffpairvsdiffpair=TRUE checkxsignals=TRUE checkothers=TRUE usedelayunits=TRUE delaytolerance=10.000000 targetsourcename=DDR_DQS0_P_BL2_3
MatchedLengths MatchedLengths_DATA_BL1_2 [InxSignalClass('DATA_BL1')] p12 off: tolerance=0 checknetsindiffpair=FALSE checkdiffpairvsdiffpair=TRUE checkxsignals=TRUE checkothers=TRUE usedelayunits=TRUE delaytolerance=10.000000 targetsourcename=DDR_DQS3_P_BL1_3
MatchedLengths MatchedLengths_DATA_BL0_2 [InxSignalClass('DATA_BL0')] p13 off: tolerance=0 checknetsindiffpair=FALSE checkdiffpairvsdiffpair=TRUE checkxsignals=TRUE checkothers=TRUE usedelayunits=TRUE delaytolerance=10.000000 targetsourcename=DDR_DQS2_P_BL0_3
MatchedLengths MatchedLengths_ADDR_PP2_1 [InxSignalClass('ADDR_PP2')] p14 off: tolerance=0 checknetsindiffpair=FALSE checkdiffpairvsdiffpair=TRUE checkxsignals=TRUE checkothers=TRUE usedelayunits=TRUE delaytolerance=10.000000 targetsourcename=DDR_CK_P_PP2_4
MatchedLengths MatchedLengths_ADDR_PP1_1 [InxSignalClass('ADDR_PP1')] p15 off: tolerance=0 checknetsindiffpair=FALSE checkdiffpairvsdiffpair=TRUE checkxsignals=TRUE checkothers=TRUE usedelayunits=TRUE delaytolerance=10.000000 targetsourcename=DDR_CK_P_PP1_4
MinimumSolderMaskSliver [All] p1: minsoldermaskwidth=0.1
PolygonConnect [All] p1: connectstyle=Relief reliefconductorwidth=0.254 reliefentries=4 polygonreliefangle="90 Angle" airgapwidth=0.254
RoutingTopology RoutingTopology_DDRAddressAndControls [InNetClass('DDR_AddressAndControls')] p1: topology=Daisy_Simple
RoutingTopology [All] p2: topology=Shortest
RoutingVias BGA_vias [WithinRoom('ZYNQ_BGA') or WithinRoom('DDR3L')] p1: holewidth=0.15 width=0.4 viastyle="Through Hole" minholewidth=0.15 minwidth=0.4 maxholewidth=0.15 maxwidth=0.4
RoutingVias [All] p2: holewidth=0.2 width=0.5 viastyle="Through Hole" minholewidth=0.15 minwidth=0.4 maxholewidth=0.3 maxwidth=0.6
SilkToSilkClearance [All] p1: silktosilkclearance=0.15
SilkToSolderMaskClearance [IsPad] p1: minsilkscreentomaskgap=0.1 clearancetoexposedcopper=TRUE
SolderMaskExpansion [All] p1: expansion=0.05 istentingtop=FALSE
SupplyNets "Schematic Supply Nets_28" [InNet('CHASSIS')] p1: voltage=0.000
SupplyNets "Schematic Supply Nets_27" [InNet('+VCC')] p2: voltage=0.000
SupplyNets "Schematic Supply Nets_26" [InNet('+3V3_HDMI')] p3: voltage=0.000
SupplyNets "Schematic Supply Nets_25" [InNet('+1V8_HDMI_AVDD')] p4: voltage=0.000
SupplyNets "Schematic Supply Nets_24" [InNet('+1V8_HDMI_PLVDD')] p5: voltage=0.000
SupplyNets "Schematic Supply Nets_23" [InNet('+1V8_HDMI_DVDD')] p6: voltage=0.000
SupplyNets "Schematic Supply Nets_22" [InNet('+VBUS_UART')] p7: voltage=0.000
SupplyNets "Schematic Supply Nets_21" [InNet('+3V_UART')] p8: voltage=0.000
SupplyNets "Schematic Supply Nets_20" [InNet('+5V_UART')] p9: voltage=0.000
SupplyNets "Schematic Supply Nets_19" [InNet('+3V3_ETH')] p10: voltage=0.000
SupplyNets "Schematic Supply Nets_18" [InNet('+1V8_ETH')] p11: voltage=0.000
SupplyNets "Schematic Supply Nets_17" [InNet('+1V0_ETH')] p12: voltage=0.000
SupplyNets "Schematic Supply Nets_16" [InNet('+REGOUT_ETH')] p13: voltage=0.000
SupplyNets "Schematic Supply Nets_15" [InNet('VTT')] p14: voltage=0.000
SupplyNets "Schematic Supply Nets_14" [InNet('+VUSB_OTG')] p15: voltage=0.000
SupplyNets "Schematic Supply Nets_12" [InNet('VTT_REF')] p16: voltage=0.000
SupplyNets "Schematic Supply Nets_13" [InNet('+VPHY_FTDI')] p17: voltage=0.000
SupplyNets "Schematic Supply Nets_11" [InNet('+VUSB_FTDI')] p18: voltage=0.000
SupplyNets "Schematic Supply Nets_10" [InNet('+5V_FTDI')] p19: voltage=0.000
SupplyNets "Schematic Supply Nets_9" [InNet('+3V3_FTDI')] p20: voltage=0.000
SupplyNets "Schematic Supply Nets_8" [InNet('+1V8_PLL')] p21: voltage=0.000
SupplyNets "Schematic Supply Nets_7" [InNet('+1V8')] p22: voltage=0.000
SupplyNets "Schematic Supply Nets_5" [InNet('+1V0')] p23: voltage=0.000
SupplyNets "Schematic Supply Nets_4" [InNet('+3V3')] p24: voltage=0.000
SupplyNets "Schematic Supply Nets_3" [InNet('+PWRIN')] p25: voltage=0.000
SupplyNets "Schematic Supply Nets_2" [InNet('+5V')] p26: voltage=0.000
SupplyNets "Schematic Supply Nets_1" [InNet('+1V35')] p27: voltage=0.000
SupplyNets "Schematic Supply Nets" [InNet('GND')] p28: voltage=0.000
UnRoutedNet [All] p1: checkbadconnections=TRUE
Width PWR [InNetClass('PWR_NETS')] p1: maxlimit=1 minlimit=0.2 preferedwidth=0.3
Width BGA [WithinRoom('ZYNQ_BGA')] p2: maxlimit=0.254 minlimit=0.1 preferedwidth=0.1 toplayer_minwidth=0.11 toplayer_maxwidth=0.11 toplayer_prefwidth=0.11 midlayer2_maxwidth=0.1 midlayer4_maxwidth=0.1 midlayer5_maxwidth=0.1 midlayer7_maxwidth=0.1 bottomlayer_minwidth=0.11 bottomlayer_maxwidth=0.11 bottomlayer_prefwidth=0.11 impedanceprofiledriven=TRUE impedanceprofileid={7FD89FCC-1375-44BC-9A8E-C7C091A4437B} impedanceprofilevalue=50.000000 minimp=50.000000 maximp=50.000000 favimp=50.000000
Width General [All] p3: maxlimit=0.254 minlimit=0.1 preferedwidth=0.1 toplayer_maxwidth=0.11 toplayer_prefwidth=0.11 midlayer2_maxwidth=0.1 midlayer4_maxwidth=0.1 midlayer5_maxwidth=0.1 midlayer7_maxwidth=0.1 bottomlayer_minwidth=0.11 bottomlayer_maxwidth=0.11 bottomlayer_prefwidth=0.11 impedanceprofiledriven=TRUE impedanceprofileid={7FD89FCC-1375-44BC-9A8E-C7C091A4437B} impedanceprofilevalue=50.000000 minimp=50.000000 maximp=50.000000 favimp=50.000000
23 further rules are at their usual default settings.

## Classes and differential pairs
net class PWR_NETS: 1V0_EN 1V0_FB 1V0_PG 1V0_SW 1V8_EN 1V8_FB 1V8_PG 1V8_SW 1V35_EN 1V35_FB 1V35_PG 1V35_SW 3V3_EN 3V3_FB 3V3_PG 3V3_PG_R 3V3_SW +1V0 +1V0_ETH +1V8 +1V8_ETH +1V8_HDMI_AVDD +1V8_HDMI_DVDD +1V8_HDMI_PLVDD +1V8_PLL +1V35 +3V3 +3V3_ETH +3V3_FTDI +3V3_HDMI +3V_UART +5V +5V_FTDI +5V_UART +PWRIN +REGOUT_ETH +VBUS_UART +VCC +VPHY_FTDI +VUSB_FTDI +VUSB_OTG GND VTT VTT_REF
net class RSCAN: RSCAN.CAN_RX RSCAN.CAN_STB RSCAN.CAN_TX RSCAN.RS485_DE RSCAN.RS485_RX RSCAN.RS485_TX
differential pair class MIPI: MIPI_CLK MIPI_LANE0 MIPI_LANE1
net class USB_ULPI: OTG_CLK OTG_DATA0 OTG_DATA1 OTG_DATA2 OTG_DATA3 OTG_DATA4 OTG_DATA5 OTG_DATA6 OTG_DATA7 OTG_DIR OTG_NXT OTG_STP
net class HDMI_DATA: HDMI_CLK HDMI_D0 HDMI_D1 HDMI_D2 HDMI_D3 HDMI_D4 HDMI_D5 HDMI_D6 HDMI_D7 HDMI_D8 HDMI_D9 HDMI_D10 HDMI_D11 HDMI_D12 HDMI_D13 HDMI_D14 HDMI_D15 HDMI_DE HDMI_HSYNC HDMI_VSYNC
differential pair class HDMI_DIFF: HDMI_TX0 HDMI_TX1 HDMI_TX2 HDMI_TX_CLK
differential pair class GiE: ETH_MDI0 ETH_MDI1 ETH_MDI2 ETH_MDI3
differential pair class DDR_ACC_CLK: DDR_CK
net class DDR3_BL3: DDR_DM2 DDR_DQ16 DDR_DQ17 DDR_DQ18 DDR_DQ19 DDR_DQ20 DDR_DQ21 DDR_DQ22 DDR_DQ23 DDR_DQS2_N DDR_DQS2_P
net class DDR3_BL2: DDR_DM3 DDR_DQ24 DDR_DQ25 DDR_DQ26 DDR_DQ27 DDR_DQ28 DDR_DQ29 DDR_DQ30 DDR_DQ31 DDR_DQS3_N DDR_DQS3_P
net class DDR3_BL1: DDR_DM0 DDR_DQ0 DDR_DQ1 DDR_DQ2 DDR_DQ3 DDR_DQ4 DDR_DQ5 DDR_DQ6 DDR_DQ7 DDR_DQS0_N DDR_DQS0_P
net class DDR3_BL0: DDR_DM1 DDR_DQ8 DDR_DQ9 DDR_DQ10 DDR_DQ11 DDR_DQ12 DDR_DQ13 DDR_DQ14 DDR_DQ15 DDR_DQS1_N DDR_DQS1_P
net class DDR3_ACC_S40: DDR_A0 DDR_A1 DDR_A2 DDR_A3 DDR_A4 DDR_A5 DDR_A6 DDR_A7 DDR_A8 DDR_A9 DDR_A10 DDR_A11 DDR_A12 DDR_A13 DDR_A14 DDR_BA0 DDR_BA1 DDR_BA2 DDR_CAS_B DDR_CKE DDR_CS_B DDR_DRST_B DDR_ODT DDR_RAS_B DDR_WE_B
differential pair class USB: FTDI_D OTG_D USB_UART_D
net class SE35: SE35.L3_35_N SE35.L3_35_P SE35.L5_35_N SE35.L5_35_P SE35.L6_35_N SE35.L6_35_P SE35.L7_35_N SE35.L7_35_P SE35.L8_35_N SE35.L8_35_P SE35.L9_35_N SE35.L9_35_P SE35.L13_35_N SE35.L13_35_P SE35.L14_35_N SE35.L14_35_P SE35.L16_35_N SE35.L16_35_P SE35.L17_35_N SE35.L17_35_P SE35.L18_35_N SE35.L18_35_P SE35.L19_35_N SE35.L19_35_P SE35.L20_35_N SE35.L20_35_P SE35.L21_35_N SE35.L21_35_P
net class DIFF34: DIFF34.L1_34_N DIFF34.L1_34_P DIFF34.L2_34_N DIFF34.L2_34_P DIFF34.L4_34_N DIFF34.L4_34_P DIFF34.L5_34_N DIFF34.L5_34_P DIFF34.L6_34_N DIFF34.L6_34_P DIFF34.L7_34_N DIFF34.L7_34_P DIFF34.L8_34_N DIFF34.L8_34_P DIFF34.L9_34_N DIFF34.L9_34_P DIFF34.L10_34_N DIFF34.L10_34_P
net class QSPI: PS_QSPI_IO0_M3 PS_QSPI_IO1_M1 PS_QSPI_IO2_M2 PS_QSPI_IO3_M0 PS_QSPI_SCK_M4 PS_QSPI_SS QSPI_CLK
net class eMMC: PS_SD_CLK PS_SD_CMD PS_SD_IO0 PS_SD_IO1 PS_SD_IO2 PS_SD_IO3 SD_CLK_OUT
component class U_ZHSD-ZYNQ-PL: D1400 D1401 D1402 R1400 R1401 R1402 R1403 R1404 R1405 R1406 R1407 R1408 R1409 R1410 R1411 R1412 R1413 R1414 R1415 S1400 S1401 S1402 S1403 S1404 S1405
component class U_ZHSD-PL-CONNS: J1 J2
component class U_ZHSD-ZYNQ-MIO: C800 C801 C802 C803 C804 C805 C806 D800 Q800 Q801 R800 R801 R802 R803 R804 R805 R806 R807 R808 R809 R810 R811 R812 R813 R814 R815 R816 R817 R818 R819 R820 R821 R822 R823 R824 S800 S801 S802 U800 U802 U803 X800
component class U_ZHSD-ZYNQ-DDR: C600 C601 C602 C603 C604 C605 C606 C607 C608 C609 C610 C611 C612 R600 R601 R602 R603 R604 R605 R606 R607 R608 R609 R610 R611 R612 R613 R614 R615 R616 R617 R618 R619 R620 R621 R622 R623 R624 R625 R626 R627
component class U_ZHSD-BOOT-STORAGE: C900 C901 C902 C903 C904 C905 C906 C907 C908 C909 C910 C911 C912 R900 R901 R902 R903 R904 R905 R906 R907 R908 R909 R910 R911 R912 R913 R914 R915 R916 R917 R918 R919 R920 SW900 U900 U901
net class HDMI_D[0..15]: HDMI_D0 HDMI_D1 HDMI_D2 HDMI_D3 HDMI_D4 HDMI_D5 HDMI_D6 HDMI_D7 HDMI_D8 HDMI_D9 HDMI_D10 HDMI_D11 HDMI_D12 HDMI_D13 HDMI_D14 HDMI_D15
component class U_ZHSD-MIPI-CSI2: J1600 R1600 R1601 R1602 R1603 R1604 R1605 R1606 R1607 R1608 R1609 R1610
component class U_ZHSD-USB-UART: C1200 C1201 C1202 C1203 C1204 C1205 D1200 D1201 D1202 FB1200 J1200 Q1200 Q1201 R1200 R1201 R1202 R1203 R1204 U1200
component class U_ZHSD-RS485: C1300 C1301 C1302 C1303 C1304 C1305 C1306 J1300 J1301 Q1300 Q1301 R1300 R1301 R1302 R1303 R1304 R1305 R1306 R1307 R1308 U1300 U1301 U1302
component class U_ZHSD-HDMI: C1500 C1501 C1502 C1503 C1504 C1505 C1506 C1507 C1508 C1509 C1510 C1511 C1512 C1513 C1514 C1515 C1516 C1517 C1518 C1519 C1520 D1500 D1501 D1502 D1503 D1504 D1505 D1506 D1507 D1508 D1509 D1510 D1511 D1512 D1513 FB1500 FB1501 FB1502 FB1503 J1500 R1500 R1501 R1502 R1503 R1504 R1505 R1506 R1507 R1508 R1509 R1510 U1500 X1500
component class U_ZHSD-USB-OTG: C1000 C1001 C1002 C1003 C1004 C1005 C1006 C1007 C1008 D1000 D1001 D1002 D1003 J1000 R1000 R1001 R1002 R1003 R1004 R1005 R1006 U1000 U1001 X1000
component class U_ZHSD-ETHERNET: C1100 C1101 C1102 C1103 C1104 C1105 C1106 C1107 C1108 C1109 C1110 C1111 C1112 C1113 C1114 C1115 C1116 C1117 FB1100 FB1101 J1100 L1100 R1100 R1101 R1102 R1103 R1104 R1105 R1106 R1107 R1108 R1109 R1110 R1111 R1112 R1113 R1114 R1115 R1116 R1117 R1118 R1119 R1120 R1121 R1122 R1123 U1100 X1100
component class U_ZHSD-DDR3L: C701 C702 C703 C704 C705 C707 C708 C709 C710 C711 C712 C713 C714 C715 C716 C717 C718 C719 C720 C721 C722 C723 C725 C726 C727 C728 C729 C731 C732 C733 C734 C735 C736 C737 C738 C739 C740 C741 C742 C743 C744 C745 R700 R701 U700 U701
component class U_ZHSD-POWER: C200 C201 C202 C203 C204 C205 C206 C207 C208 C209 C210 C211 C212 C213 C214 C215 C216 C217 C218 C219 C220 C221 C222 D200 D201 J200 L200 L201 L202 L203 Q200 R200 R201 R202 R203 R204 R205 R206 R207 R208 R209 R210 R211 R212 R213 R214 R215 R216 R217 R218 U200 U201 U202 U203 U204 U205
component class U_ZHSD-ZYNQ-PWR: C300 C301 C302 C303 C304 C305 C306 C307 C308 C309 C310 C311 C312 C313 C314 C315 C316 C317 C318 C319 C320 C321 C322 C323 C324 C325 C326 C327 C328 C329 C330 C331 C332 C333 C334 C335 C336 C337 C338 C339 C340 C341 C342 C343 C344 C345 C346 C347 C348 C349 C350 C351 C352 C353 C354 C355 C356 C357 FB300 R300
component class U_ZHSD-JTAG: C500 C501 C502 C503 C504 C505 C506 C507 C508 C509 C510 C511 C512 C513 C514 C515 C516 D500 D501 D502 D503 D504 D505 FB500 FB501 FB502 J500 J501 R500 R501 R502 R503 R504 R505 R506 R507 R508 R509 R510 U500 X500
component class U_ZHSD-ZYNQ-CONFIG: D400 Q400 R400 R401 R402 R403 R404 R405 S400 U300
differential pair MIPI_LANE1: +MIPI_LANE1_P -MIPI_LANE1_N
differential pair MIPI_LANE0: +MIPI_LANE0_P -MIPI_LANE0_N
differential pair MIPI_CLK: +MIPI_CLK_P -MIPI_CLK_N
differential pair HDMI_TX_CLK: +HDMI_TX_CLK_P -HDMI_TX_CLK_N
differential pair HDMI_TX2: +HDMI_TX2_P -HDMI_TX2_N
differential pair HDMI_TX1: +HDMI_TX1_P -HDMI_TX1_N
differential pair HDMI_TX0: +HDMI_TX0_P -HDMI_TX0_N
differential pair DDR_DQS3: +DDR_DQS3_P -DDR_DQS3_N
differential pair DDR_DQS1: +DDR_DQS1_P -DDR_DQS1_N
differential pair DDR_DQS2: +DDR_DQS2_P -DDR_DQS2_N
differential pair DDR_DQS0: +DDR_DQS0_P -DDR_DQS0_N
differential pair DDR_CK: +DDR_CK_P -DDR_CK_N
differential pair USB_UART_D: +USB_UART_D_P -USB_UART_D_N
differential pair OTG_D: +OTG_D_P -OTG_D_N
differential pair ETH_MDI3: +ETH_MDI3_P -ETH_MDI3_N
differential pair ETH_MDI2: +ETH_MDI2_P -ETH_MDI2_N
differential pair ETH_MDI1: +ETH_MDI1_P -ETH_MDI1_N
differential pair ETH_MDI0: +ETH_MDI0_P -ETH_MDI0_N
differential pair FTDI_D: +FTDI_D_P -FTDI_D_N

## Components (designator, comment, footprint, x,y, rotation, side; value= is the part's Value field where it differs from the comment)
C200 "120p" 0603CAPC1608X09N 17.125,33.4 r90 top value="120 pF"
C201 "10u" 0603CAPC1608X09N 16.1,36.6 r90 top value="10 µF"
C202 "10u" 0603CAPC1608X09N 17.95,36.7 r90 top value="10 µF"
C203 "4u7" 0805CAPC2012X14N 10.6,36.775 r90 top value="4.7 µF"
C204 "1u" 0603CAPC1608X09N 22.175,17.762 r180 top value="1 µF"
C205 "1u" 0603CAPC1608X09N 19.027,9.962 r90 top value="1 µF"
C206 "1n" 0603CAPC1608X09N 27.425,15.337 r90 top value="1000 pF"
C207 "120p" 0603CAPC1608X09N 14.725,47.415 r0 top value="120 pF"
C208 "10u" 0603CAPC1608X09N 17.899,52.085 r90 top value="10 µF"
C209 "10u" 0603CAPC1608X09N 19.825,51.99 r90 top value="10 µF"
C210 "4u7" 0805CAPC2012X14N 8.7,51.94 r90 top value="4.7 µF"
C211 "100n" 0402CAPC1005X06N 16.825,90.39 r180 top value="0.1 µF"
C212 "10u" 0603CAPC1608X09N 17.65,85.54 r180 top value="10 µF"
C213 "470n" 0402CAPC1005X06N 19.5,88.565 r90 top value="0.47 µF"
C214 "10u" 0603CAPC1608X09N 15.175,87.265 r270 top value="10 µF"
C215 "120p" 0603CAPC1608X09N 15.85,61.521 r0 top value="120 pF"
C216 "10u" 0603CAPC1608X09N 18.6,66.646 r90 top value="10 µF"
C217 "10u" 0603CAPC1608X09N 21.275,66.671 r90 top value="10 µF"
C218 "4u7" 0805CAPC2012X14N 11.45,65.496 r90 top value="4.7 µF"
C219 "120p" 0603CAPC1608X09N 14.446,76.15 r0 top value="120 pF"
C220 "10u" 0603CAPC1608X09N 16.671,80.375 r90 top value="10 µF"
C221 "10u" 0603CAPC1608X09N 18.846,80.2 r90 top value="10 µF"
C222 "4u7" 0805CAPC2012X14N 9.221,79.8 r90 top value="4.7 µF"
C300 "470n" 0402CAPC1005X06N 59.1,61.6 r0 bottom value="0.47 µF"
C301 "10u" 0603CAPC1608X09N -28.483,97.425 r270 top value="10 µF"
C302 "47u" 1210CAPC3225X27N -18.167,93.104 r270 top value="47 µF"
C303 "330u" T525D337M006ATE025 -27.182,29.7 r90 top value="330 µF"
C304 "4u7" 0603CAPC1608X09N -33.011,29.543 r270 top value="4.7 µF"
C305 "4u7" 0603CAPC1608X09N -31.936,29.55 r270 top value="4.7 µF"
C306 "470n" 0402CAPC1005X06N 61.1,61.8 r270 bottom value="0.47 µF"
C307 "470n" 0402CAPC1005X06N 64.2,55.6 r270 bottom value="0.47 µF"
C308 "470n" 0402CAPC1005X06N 57.9,57.95 r270 bottom value="0.47 µF"
C309 "470n" 0402CAPC1005X06N 58.6,54.85 r90 bottom value="0.47 µF"
C310 "470n" 0402CAPC1005X06N 58.975,64.775 r180 bottom value="0.47 µF"
C311 "4u7" 0603CAPC1608X09N -30.582,54.45 r90 top value="4.7 µF"
C312 "100u" 1210CAPC3225X27N -27.201,55.025 r90 top value="100 µF"
C313 "470n" 0402CAPC1005X06N 61.95,65.5 r0 bottom value="0.47 µF"
C314 "4u7" 0603CAPC1608X09N -20.682,99.1 r90 top value="4.7 µF"
C315 "100u" 1210CAPC3225X27N -17.633,99.775 r90 top value="100 µF"
C316 "47u" 1210CAPC3225X27N -27.294,39.625 r270 top value="47 µF"
C317 "4u7" 0603CAPC1608X09N 61.1,57.75 r270 bottom value="4.7 µF"
C318 "470n" 0402CAPC1005X06N 61.1,55.4 r270 bottom value="0.47 µF"
C319 "470n" 0402CAPC1005X06N 61.093,59.962 r90 bottom value="0.47 µF"
C320 "470n" 0402CAPC1005X06N 58.95,53.7 r180 bottom value="0.47 µF"
C321 "470n" 0402CAPC1005X06N 62.35,53.7 r0 bottom value="0.47 µF"
C322 "4u7" 0603CAPC1608X09N -30.282,78.85 r90 top value="4.7 µF"
C323 "100u" 1210CAPC3225X27N -26.729,78.65 r90 top value="100 µF"
C324 "47u" 1210CAPC3225X27N -27.131,19.25 r270 top value="47 µF"
C325 "4u7" 0603CAPC1608X09N -30.607,19.242 r270 top value="4.7 µF"
C326 "4u7" 0603CAPC1608X09N 68.7,65.2 r315 bottom value="4.7 µF"
C327 "470n" 0402CAPC1005X06N 63.9,60.7 r0 bottom value="0.47 µF"
C328 "470n" 0402CAPC1005X06N 68.4,61.5 r225 bottom value="0.47 µF"
C329 "470n" 0402CAPC1005X06N 63.9,51.6 r225 bottom value="0.47 µF"
C330 "470n" 0402CAPC1005X06N 66.45,56.7 r180 bottom value="0.47 µF"
C331 "100u" 1210CAPC3225X27N -26.552,72.125 r270 top value="100 µF"
C332 "4u7" 0603CAPC1608X09N -28.674,-10.328 r0 bottom value="4.7 µF"
C333 "470n" 0402CAPC1005X06N 59.15,57.6 r180 bottom value="0.47 µF"
C334 "47u" 1210CAPC3225X27N -27.282,47.1 r270 top value="47 µF"
C335 "4u7" 0603CAPC1608X09N -30.731,47.398 r270 top value="4.7 µF"
C336 "4u7" 0603CAPC1608X09N -32.707,47.523 r270 top value="4.7 µF"
C337 "470n" 0402CAPC1005X06N 57.8,49.8 r0 bottom value="0.47 µF"
C338 "470n" 0402CAPC1005X06N 61.15,49.85 r270 bottom value="0.47 µF"
C339 "470n" 0402CAPC1005X06N 68.682,52.782 r225 bottom value="0.47 µF"
C340 "470n" 0402CAPC1005X06N 69.2,51.3 r315 bottom value="0.47 µF"
C341 "470n" 0402CAPC1005X06N 55.175,50.275 r0 bottom value="0.47 µF"
C342 "470n" 0402CAPC1005X06N 53.663,52.922 r180 bottom value="0.47 µF"
C343 "470n" 0402CAPC1005X06N 54.05,65.025 r35 bottom value="0.47 µF"
C344 "470n" 0402CAPC1005X06N 53.6,57.05 r0 bottom value="0.47 µF"
C345 "4u7" 0603CAPC1608X09N -22.482,107.3 r90 top value="4.7 µF"
C346 "100u" 1210CAPC3225X27N -18.965,107.375 r90 top value="100 µF"
C347 "470n" 0402CAPC1005X06N 63.1,57.6 r0 bottom value="0.47 µF"
C348 "4u7" 0603CAPC1608X09N -31.682,63.2 r90 top value="4.7 µF"
C349 "100u" 1210CAPC3225X27N -28.04,63.05 r90 top value="100 µF"
C350 "47u" 1210CAPC3225X27N -26.696,12.65 r270 top value="47 µF"
C351 "4u7" 0603CAPC1608X09N -30.507,12.9 r270 top value="4.7 µF"
C352 "4u7" 0603CAPC1608X09N -32.182,12.8 r270 top value="4.7 µF"
C353 "470n" 0402CAPC1005X06N 68.9,59.2 r270 bottom value="0.47 µF"
C354 "470n" 0402CAPC1005X06N 68.5,56.9 r315 bottom value="0.47 µF"
C355 "470n" 0402CAPC1005X06N 57.8,65.6 r180 bottom value="0.47 µF"
C356 "470n" 0402CAPC1005X06N 56.45,57.6 r0 bottom value="0.47 µF"
C357 "1n" 0805CAPC2012X14N 10.85,-14.984 r180 top value="1000 pF"
C500 "100n" 0603CAPC1608X09N 51.3,96.175 r270 top value="0.1 µF"
C501 "4u7" 0603CAPC1608X09N 52.6,96.2 r270 top value="4.7 µF"
C502 "100n" 0603CAPC1608X09N 41.375,103.475 r0 top value="0.1 µF"
C503 "4u7" 0603CAPC1608X09N 41.375,104.7 r0 top value="4.7 µF"
C504 "100n" 0603CAPC1608X09N 47.65,103.975 r0 top value="0.1 µF"
C505 "4u7" 0603CAPC1608X09N 47.625,102.7 r0 top value="4.7 µF"
C506 "4u7" 0603CAPC1608X09N 51.925,103.95 r270 top value="4.7 µF"
C507 "4u7" 0603CAPC1608X09N 52.75,100.425 r0 top value="4.7 µF"
C508 "100n" 0603CAPC1608X09N 52.925,93.075 r90 top value="0.1 µF"
C509 "4u7" 0603CAPC1608X09N 46.725,96.575 r270 bottom value="4.7 µF"
C510 "100n" 0603CAPC1608X09N 46.3,98.525 r0 bottom value="0.1 µF"
C511 "100n" 0603CAPC1608X09N 43.075,98.825 r180 bottom value="0.1 µF"
C512 "100n" 0603CAPC1608X09N 42.75,94.55 r270 bottom value="0.1 µF"
C513 "100n" 0603CAPC1608X09N 50.325,90.3 r0 top value="0.1 µF"
C514 "100n" 0603CAPC1608X09N 50.3,92 r0 top value="0.1 µF"
C515 "100n" 0603CAPC1608X09N 54.1,102.575 r270 bottom value="0.1 µF"
C516 "100n" 0603CAPC1608X09N 32.95,106.6 r0 bottom value="0.1 µF"
C600 "470n" 0402CAPC1005X06N -2.675,-11.45 r90 top value="0.47 µF"
C601 "470n" 0402CAPC1005X06N -0.175,-11.45 r90 top value="0.47 µF"
C602 "10u" 0603CAPC1608X09N 19.275,88.65 r0 bottom value="10 µF"
C603 "10u" 0603CAPC1608X09N 19.275,50.3 r0 bottom value="10 µF"
C604 "4u7" 0603CAPC1608X09N 19.275,82.2 r0 bottom value="4.7 µF"
C605 "4u7" 0603CAPC1608X09N 19.275,71.75 r0 bottom value="4.7 µF"
C606 "4u7" 0603CAPC1608X09N 19.275,60.375 r0 bottom value="4.7 µF"
C607 "100n" 0603CAPC1608X09N 22.925,82.506 r180 bottom value="0.1 µF"
C608 "100n" 0603CAPC1608X09N 22.925,76.106 r180 bottom value="0.1 µF"
C609 "100n" 0603CAPC1608X09N 22.925,69.756 r180 bottom value="0.1 µF"
C610 "100n" 0603CAPC1608X09N 22.925,63.656 r180 bottom value="0.1 µF"
C611 "100n" 0603CAPC1608X09N 22.925,57.206 r180 bottom value="0.1 µF"
C612 "100n" 0603CAPC1608X09N 22.925,51.156 r180 bottom value="0.1 µF"
C701 "100n" 0402CAPC1005X06N 38.125,62.9 r0 bottom value="0.1 µF"
C702 "100n" 0402CAPC1005X06N 35.65,62.8 r180 bottom value="0.1 µF"
C703 "100n" 0402CAPC1005X06N 33.275,61.325 r180 bottom value="0.1 µF"
C704 "100n" 0402CAPC1005X06N 30.775,61.25 r0 bottom value="0.1 µF"
C705 "100n" 0402CAPC1005X06N 36.9,61.75 r90 bottom value="0.1 µF"
C707 "100n" 0402CAPC1005X06N -23.39,-12.403 r90 bottom value="0.1 µF"
C708 "100n" 0402CAPC1005X06N 44.225,47.35 r90 bottom value="0.1 µF"
C709 "100n" 0402CAPC1005X06N 37.25,45.8 r180 bottom value="0.1 µF"
C710 "100n" 0402CAPC1005X06N 32.55,45.825 r0 bottom value="0.1 µF"
C711 "100n" 0402CAPC1005X06N 34.1,54.45 r180 bottom value="0.1 µF"
C712 "100n" 0402CAPC1005X06N 383.746,27.852 r90 top value="0.1 µF"
C713 "100n" 0402CAPC1005X06N 391.096,27.852 r90 top value="0.1 µF"
C714 "10u" 0603CAPC1608X09N 8.25,29.25 r180 top value="10 µF"
C715 "470n" 0402CAPC1005X06N 44.025,62.4 r90 bottom value="0.47 µF"
C716 "100n" 0402CAPC1005X06N 40.825,63.025 r270 bottom value="0.1 µF"
C717 "100n" 0402CAPC1005X06N 42.084,61.244 r180 bottom value="0.1 µF"
C718 "100n" 0402CAPC1005X06N 38.931,61.244 r0 bottom value="0.1 µF"
C719 "10u" 0603CAPC1608X09N -20.144,-12.953 r90 bottom value="10 µF"
C720 "470n" 0402CAPC1005X06N -30.484,-12.403 r90 bottom value="0.47 µF"
C721 "100n" 0402CAPC1005X06N 38.95,45.825 r0 bottom value="0.1 µF"
C722 "100n" 0402CAPC1005X06N 30.875,45.825 r0 bottom value="0.1 µF"
C723 "100n" 0402CAPC1005X06N 31.675,54.475 r180 bottom value="0.1 µF"
C725 "100n" 0402CAPC1005X06N 38.8,54.5 r180 bottom value="0.1 µF"
C726 "100n" 0402CAPC1005X06N 37.125,53.8 r0 bottom value="0.1 µF"
C727 "100n" 0402CAPC1005X06N 42.775,52.825 r180 bottom value="0.1 µF"
C728 "100n" 0402CAPC1005X06N 40.775,52.65 r90 bottom value="0.1 µF"
C729 "100n" 0402CAPC1005X06N 36.425,52.85 r180 bottom value="0.1 µF"
C731 "100n" 0402CAPC1005X06N 38.8,70.05 r180 bottom value="0.1 µF"
C732 "100n" 0402CAPC1005X06N 41.25,69.9 r0 bottom value="0.1 µF"
C733 "100n" 0402CAPC1005X06N 42.95,69.85 r0 bottom value="0.1 µF"
C734 "100n" 0402CAPC1005X06N 40.6,68.375 r0 bottom value="0.1 µF"
C735 "100n" 0402CAPC1005X06N 42.1,66.875 r180 bottom value="0.1 µF"
C736 "10u" 0603CAPC1608X09N -27.237,-12.953 r90 bottom value="10 µF"
C737 "470n" 0402CAPC1005X06N 42.125,45.7 r195 bottom value="0.47 µF"
C738 "100n" 0402CAPC1005X06N 40.6,54.475 r0 bottom value="0.1 µF"
C739 "100n" 0402CAPC1005X06N 42.85,54.45 r0 bottom value="0.1 µF"
C740 "100n" 0402CAPC1005X06N 34.825,48.925 r180 bottom value="0.1 µF"
C741 "10u" 0603CAPC1608X09N 7.25,27.5 r180 top value="10 µF"
C742 "470n" 0402CAPC1005X06N 32.525,69.925 r0 bottom value="0.47 µF"
C743 "100n" 0402CAPC1005X06N 30.825,69.925 r0 bottom value="0.1 µF"
C744 "100n" 0402CAPC1005X06N 36.375,68.375 r180 bottom value="0.1 µF"
C745 "100n" 0402CAPC1005X06N 37.25,69.25 r0 bottom value="0.1 µF"
C800 "100n" 0603CAPC1608X09N 453.699,235.487 r90 top value="0.1 µF"
C801 "100n" 0603CAPC1608X09N 38.75,89.25 r0 top value="0.1 µF"
C802 "100n" 0603CAPC1608X09N 383.696,235.487 r90 top value="0.1 µF"
C803 "100n" 0603CAPC1608X09N 168.476,-12.95 r90 top value="0.1 µF"
C804 "100n" 0603CAPC1608X09N 330.843,235.487 r90 top value="0.1 µF"
C805 "100n" 0603CAPC1608X09N 285.066,235.487 r90 top value="0.1 µF"
C806 "100n" 0603CAPC1608X09N 149.559,235.487 r90 top value="0.1 µF"
C900 "100n" 0603CAPC1608X09N 72.075,85.8 r270 bottom value="0.1 µF"
C901 "100n" 0603CAPC1608X09N 69.721,85.875 r0 bottom value="0.1 µF"
C902 "100n" 0603CAPC1608X09N 67.025,86.475 r90 bottom value="0.1 µF"
C903 "1u" 0603CAPC1608X09N 62.308,86.035 r90 top value="1 µF"
C904 "4u7" 0603CAPC1608X09N 62.3,90.075 r270 top value="4.7 µF"
C905 "100n" 0603CAPC1608X09N 70.05,82.825 r180 bottom value="0.1 µF"
C906 "100n" 0603CAPC1608X09N 69.363,93.435 r0 top value="0.1 µF"
C907 "100n" 0603CAPC1608X09N 71.475,90.425 r0 bottom value="0.1 µF"
C908 "1u" 0603CAPC1608X09N 73.425,93.4 r180 top value="1 µF"
C909 "4u7" 0603CAPC1608X09N 76.675,91.95 r270 top value="4.7 µF"
C910 "100n" 0603CAPC1608X09N 73.6,86.95 r270 bottom value="0.1 µF"
C911 "1u" 0603CAPC1608X09N 75.036,86.947 r270 bottom value="1 µF"
C912 "100n" 0603CAPC1608X09N 50.55,84.15 r0 top value="0.1 µF"
C1000 "100n" 0603CAPC1608X09N 83.175,103.075 r90 bottom value="0.1 µF"
C1001 "470n" 0402CAPC1005X06N 81.9,102.7 r90 bottom value="0.47 µF"
C1002 "100n" 0603CAPC1608X09N 79.625,99.85 r180 bottom value="0.1 µF"
C1003 "100n" 0603CAPC1608X09N 84.65,99.7 r0 bottom value="0.1 µF"
C1004 "100n" 0603CAPC1608X09N 79.65,97.525 r180 bottom value="0.1 µF"
C1005 "100n" 0603CAPC1608X09N 79.075,105.125 r0 top value="0.1 µF"
C1006 "4u7" 0603CAPC1608X09N 76.75,104.35 r270 top value="4.7 µF"
C1007 "100n" 0603CAPC1608X09N 76,97.675 r0 top value="0.1 µF"
C1008 "100n" 0603CAPC1608X09N 70.279,100.153 r270 bottom value="0.1 µF"
C1100 "100n" 0603CAPC1608X09N 112.25,86.217 r180 top value="0.1 µF"
C1101 "4u7" 0603CAPC1608X09N 112.25,87.98 r180 top value="4.7 µF"
C1102 "100n" 0603CAPC1608X09N 101.8,84.625 r90 bottom value="0.1 µF"
C1103 "100n" 0603CAPC1608X09N 94.8,78.582 r0 top value="0.1 µF"
C1104 "4u7" 0603CAPC1608X09N 107.25,85.85 r30 bottom value="4.7 µF"
C1105 "100n" 0603CAPC1608X09N 94.8,82.109 r180 top value="0.1 µF"
C1106 "4u7" 0603CAPC1608X09N 94.8,83.873 r180 top value="4.7 µF"
C1107 "100n" 0603CAPC1608X09N 112.25,84.453 r0 top value="0.1 µF"
C1108 "100n" 0603CAPC1608X09N 112.5,80.15 r0 top value="0.1 µF"
C1109 "100n" 0603CAPC1608X09N 103.375,86.075 r90 bottom value="0.1 µF"
C1110 "4u7" 0603CAPC1608X09N 112.5,76.623 r0 top value="4.7 µF"
C1111 "100n" 0603CAPC1608X09N 94.8,80.345 r0 top value="0.1 µF"
C1112 "4u7" 0603CAPC1608X09N 104.525,79.9 r270 bottom value="4.7 µF"
C1113 "100n" 0603CAPC1608X09N 94.8,85.636 r0 top value="0.1 µF"
C1114 "4u7" 0603CAPC1608X09N 107.6,83.65 r0 bottom value="4.7 µF"
C1115 "100n" 0603CAPC1608X09N 102.25,80.225 r270 bottom value="0.1 µF"
C1116 "100n" 0603CAPC1608X09N 104.9,86.1 r90 bottom value="0.1 µF"
C1117 "100n" 0603CAPC1608X09N 112.5,78.386 r180 top value="0.1 µF"
C1200 "100n" 0603CAPC1608X09N 68.675,100.975 r90 top value="0.1 µF"
C1201 "4u7" 0603CAPC1608X09N 65.225,101.225 r0 bottom value="4.7 µF"
C1202 "100n" 0603CAPC1608X09N 67.4,98.025 r90 top value="0.1 µF"
C1203 "4u7" 0603CAPC1608X09N 68.65,98.025 r90 top value="4.7 µF"
C1204 "4u7" 0603CAPC1608X09N 66.05,104.325 r180 top value="4.7 µF"
C1205 "4u7" 0603CAPC1608X09N 68.425,103.8 r270 top value="4.7 µF"
C1300 "10u" 0603CAPC1608X09N 84.6,19.5 r180 top value="10 µF"
C1301 "100n" 0603CAPC1608X09N 86.275,23.15 r90 top value="0.1 µF"
C1302 "100n" 0603CAPC1608X09N 81.925,23.125 r90 top value="0.1 µF"
C1303 "100n" 0603CAPC1608X09N 81.1,15.35 r90 top value="0.1 µF"
C1304 "1n" 0603CAPC1608X09N 84.675,8.925 r90 top value="1000 pF"
C1305 "100n" 0603CAPC1608X09N 96.95,11.2 r270 top value="0.1 µF"
C1306 "4u7" 0603CAPC1608X09N 98.5,11.175 r270 top value="4.7 µF"
C1500 "100n" 0603CAPC1608X09N 75.25,19.35 r180 bottom value="0.1 µF"
C1501 "100n" 0603CAPC1608X09N 75.325,17.75 r180 bottom value="0.1 µF"
C1502 "10u" 0603CAPC1608X09N 75.275,16.05 r180 bottom value="10 µF"
C1503 "100n" 0603CAPC1608X09N 72.925,40.15 r270 top value="0.1 µF"
C1504 "100n" 0603CAPC1608X09N 74.575,40.25 r270 top value="0.1 µF"
C1505 "100n" 0603CAPC1608X09N 52.875,25.05 r90 bottom value="0.1 µF"
C1506 "100n" 0603CAPC1608X09N 80.2,32.9 r270 top value="0.1 µF"
C1507 "10u" 0603CAPC1608X09N 58,27.45 r180 bottom value="10 µF"
C1508 "10u" 0603CAPC1608X09N 51.775,29.6 r270 top value="10 µF"
C1509 "100n" 0603CAPC1608X09N 53.35,29.5 r270 top value="0.1 µF"
C1510 "100n" 0603CAPC1608X09N 56.2,23.275 r180 top value="0.1 µF"
C1511 "100n" 0603CAPC1608X09N 59.375,7.35 r180 bottom value="0.1 µF"
C1512 "10u" 0603CAPC1608X09N 67.275,36.25 r90 bottom value="10 µF"
C1513 "100n" 0603CAPC1608X09N 67.475,28.025 r0 bottom value="0.1 µF"
C1514 "100n" 0603CAPC1608X09N 57.1,30.9 r270 bottom value="0.1 µF"
C1515 "100n" 0603CAPC1608X09N 57.275,37.375 r90 bottom value="0.1 µF"
C1516 "100n" 0603CAPC1608X09N 53.65,40.075 r270 top value="0.1 µF"
C1517 "100n" 0603CAPC1608X09N 69.9,41.825 r180 top value="0.1 µF"
C1518 "1u" 0603CAPC1608X09N 58,14.175 r270 top value="1 µF"
C1519 "1u" 0603CAPC1608X09N 61.475,14.325 r270 top value="1 µF"
C1520 "100n" 0603CAPC1608X09N 78.9,24.25 r90 bottom value="0.1 µF"
D200 "CMS04(TE12L,Q,M)" SOD-128 19.725,20.562 r180 top
D201 "LED GREEN" 0603_LED_1608N 8.621,94.35 r90 top
D400 "LED GREEN" 0603_LED_1608N 47.3,25.3 r180 top
D500 "B72590D0050H160" 0402DIOC1005X06N 43.675,104.4 r0 top
D501 "B72590D0050H160" 0402DIOC1005X06N 45.45,104.4 r180 top
D502 "B72590D0050H160" 0402DIOC1005X06N 24,106.45 r90 bottom
D503 "B72590D0050H160" 0402DIOC1005X06N 26.475,106.45 r90 bottom
D504 "B72590D0050H160" 0402DIOC1005X06N 29.05,106.45 r90 bottom
D505 "B72590D0050H160" 0402DIOC1005X06N 21.4,106.45 r90 bottom
D800 "LED GREEN" 0603_LED_1608N 120.15,56.1 r180 top
D1000 "B72590D0050H160" 0402DIOC1005X06N 81.55,106.882 r270 bottom
D1001 "B72590D0050H160" 0402DIOC1005X06N 82.4,106.875 r270 bottom
D1002 "B72590D0050H160" 0402DIOC1005X06N 83.25,106.875 r270 bottom
D1003 "LED GREEN" 0603_LED_1608N 73.375,103.15 r270 top
D1200 "B72590D0050H160" 0402DIOC1005X06N 64.981,106.243 r270 bottom
D1201 "B72590D0050H160" 0402DIOC1005X06N 64.147,106.243 r270 bottom
D1202 "B72590D0050H160" 0402DIOC1005X06N 63.329,106.243 r270 bottom
D1400 "LED GREEN" 0603_LED_1608N 117.525,31.275 r180 top
D1401 "LED GREEN" 0603_LED_1608N 126.131,3.23 r180 top
D1402 "LED GREEN" 0603_LED_1608N 117.711,38.325 r180 top
D1500 "BAS16XV2T1G" SODFL160X50-2N 68.625,21.925 r270 top
D1501 "B72590D0050H160" 0402DIOC1005X06N 62.2,11.55 r180 top
D1502 "B72590D0050H160" 0402DIOC1005X06N 63.579,6.225 r90 bottom
D1503 "B72590D0050H160" 0402DIOC1005X06N 61.825,12.4 r180 top
D1504 "B72590D0050H160" 0402DIOC1005X06N 60.1,12.525 r0 top
D1505 "B72590D0050H160" 0402DIOC1005X06N 64.493,6.225 r90 bottom
D1506 "B72590D0050H160" 0402DIOC1005X06N 57.5,10.975 r0 top
D1507 "B72590D0050H160" 0402DIOC1005X06N 59.65,11.7 r0 top
D1508 "B72590D0050H160" 0402DIOC1005X06N 65.407,6.225 r90 bottom
D1509 "B72590D0050H160" 0402DIOC1005X06N 62.664,6.225 r90 bottom
D1510 "B72590D0050H160" 0402DIOC1005X06N 67.236,6.225 r90 bottom
D1511 "B72590D0050H160" 0402DIOC1005X06N 66.321,6.225 r90 bottom
D1512 "B72590D0050H160" 0402DIOC1005X06N 61.75,6.225 r90 bottom
D1513 "B72590D0050H160" 0402DIOC1005X06N 68.15,6.225 r90 bottom
FB300 "120 Ohms @ 100 MHz" 0603INDC1608X08N -33.183,98.375 r270 top
FB500 "120R" 0603INDC1608X08N 52.75,101.775 r0 top
FB501 "120R" 0603INDC1608X08N 40.55,101.25 r270 top
FB502 "120R" 0603INDC1608X08N 49.75,101.475 r270 top
FB1100 "120R" 0603INDC1608X08N 114.8,90.65 r0 bottom
FB1101 "120R" 0603INDC1608X08N 94.8,87.4 r0 top
FB1200 "120R" 0603INDC1608X08N 66.075,103.125 r0 top
FB1500 "120R" 0603INDC1608X08N 75.25,21.3 r180 bottom
FB1501 "120R" 0603INDC1608X08N 78.875,32.875 r270 top
FB1502 "120R" 0603INDC1608X08N 50.3,29.55 r270 top
FB1503 "120R" 0603INDC1608X08N 69.875,43.25 r180 top
J1 "10144518-082802LF" 10144518-082802LF 116.7,57 r270 bottom
J2 "10144518-082802LF" 10144518-082802LF 8.825,56.45 r270 bottom
J200 "KLS1-DC-005A" CONN-KLS1-DC-005A 7.3,19.687 r0 top
J500 "10118192-0001LF" "USB2.0 MICRO B SMD" 44.975,107.6 r180 top
J501 "6P-HEADER" CONN-6P-HEADER 27.765,108.85 r90 top
J1000 "0475900001" "USB2.0 MICRO AB SMD" 82.4,109.55 r180 top
J1100 "HY911130A" HY911130A 104.325,99.8 r0 top
J1200 "10118192-0001LF" "USB2.0 MICRO B SMD" 63.55,107.6 r180 top
J1300 "3P-TERM-BLK" CONN-3P-TERM-BLK 85.535,3.5 r90 top
J1301 "3P-TERM-BLK" CONN-3P-TERM-BLK 95.04,3.55 r90 top
J1500 "10029449-111RLF" AMPHENOL_10029449-111RLF 62.925,5.3 r0 top
J1600 "1-1734248-5" TE_1-1734248-5 38.075,35.825 r180 top
L200 "470n" 0806INDC2016X10N 15.025,39.675 r0 top
L201 "470n" 0806INDC2016X10N 14.45,54.515 r0 top
L202 "470n" 0806INDC2016X10N 15.25,68.596 r180 top
L203 "470n" 0806INDC2016X10N 14.891,83.475 r0 top
L1100 "2u2" 0603INDC1608X08N 109,79.4 r0 bottom
Q200 "NDS331N" SOT95P251X112-3N 12.911,94.625 r180 top
Q400 "NDS331N" SOT95P251X112-3N 46.675,21.51 r90 top
Q800 "BSS138LT1G" SOT95P237X89-3N 58.775,85.675 r90 top
Q801 "NDS331N" SOT95P251X112-3N 120.175,62.465 r270 top
Q1200 "BSS138LT1G" SOT95P237X89-3N 57.65,102.575 r0 top
Q1201 "BSS138LT1G" SOT95P237X89-3N 57.65,97.8 r0 top
Q1300 "BSS138LT1G" SOT95P237X89-3N 95.325,20.45 r270 top
Q1301 "BSS138LT1G" SOT95P237X89-3N 90.775,20.575 r270 top
R200 "100k" 0603RESC1608X05L 12.225,33.875 r0 top value="100 kOhms"
R201 "66k5" 0603RESC1608X05N 14.85,32.775 r0 top value="66.5 kOhms"
R202 "100k" 0603RESC1608X05L 12.025,39.275 r0 top value="100 kOhms"
R203 "1M" 0603RESC1608X05N 22.975,9.387 r180 top value="1 MOhms"
R204 "100k" 0603RESC1608X05L 14.825,34.2 r180 top value="100 kOhms"
R205 "100k" 0603RESC1608X05L 15.547,9.965 r90 top value="100 kOhms"
R206 "200k" 0603RESC1608X05N 17.375,48.39 r90 top value="200 kOhms"
R207 "100k" 0603RESC1608X05L 11.25,49.465 r180 top value="100 kOhms"
R208 "100k" 0603RESC1608X05L 11.4,54.39 r0 top value="100 kOhms"
R209 "100k" 0603RESC1608X05L 14.475,48.94 r180 top value="100 kOhms"
R210 "1k" 0402RESC1005X04N 5.246,94.42 r90 top value="1 kOhms"
R211 "10k" 0603RESC1608X05N 12.95,91.225 r180 top value="10 kOhms"
R212 "124k" 0603RESC1608X05N 18.375,62.746 r90 top value="124 kOhms"
R213 "100k" 0603RESC1608X05L 12.775,62.546 r180 top value="100 kOhms"
R214 "100k" 0603RESC1608X05L 11.95,68.346 r180 top value="100 kOhms"
R215 "100k" 0603RESC1608X05L 15.55,63.221 r180 top value="100 kOhms"
R216 "453k" 0603RESC1608X05N 17.421,77.15 r270 top value="453 kOhms"
R217 "100k" 0603RESC1608X05L 11.971,77.975 r180 top value="100 kOhms"
R218 "100k" 0603RESC1608X05L 14.471,78.125 r180 top value="100 kOhms"
R300 "1M" 0603RESC1608X05N 10.85,-7.534 r180 top value="1 MOhms"
R400 "10k" 0603RESC1608X05N 25.236,101.938 r270 top value="10 kOhms"
R401 "10k" 0603RESC1608X05N 27,97.526 r270 top value="10 kOhms"
R402 "10k" 0603RESC1608X05N 63.2,49.975 r0 bottom value="10 kOhms"
R403 "10k" 0603RESC1608X05N 42.225,16.4 r90 top value="10 kOhms"
R404 "1k" 0402RESC1005X04N 49.725,24.9 r270 top value="1 kOhms"
R405 "330R" 0603RESC1608X05N 45.625,17.75 r270 top value="330 Ohms"
R500 "22R" 0603RESC1608X05N 36.05,101.033 r180 top value="22 Ohms"
R501 "22R" 0603RESC1608X05N 36.05,99.442 r180 top value="22 Ohms"
R502 "22R" 0603RESC1608X05N 36.05,97.875 r180 top value="22 Ohms"
R503 "22R" 0603RESC1608X05N 36.05,96.258 r180 top value="22 Ohms"
R504 "12k" 0603RESC1608X05N 46.3,94.55 r180 bottom value="12 kOhms"
R505 "22R" 0603RESC1608X05N 24,104.5 r90 top value="22 Ohms"
R506 "22R" 0603RESC1608X05N 26.45,104.5 r90 top value="22 Ohms"
R507 "22R" 0603RESC1608X05N 29.05,104.5 r90 top value="22 Ohms"
R508 "12k" 0603RESC1608X05N 44.125,97.175 r180 bottom value="12 kOhms"
R509 "22R" 0603RESC1608X05N 21.4,104.5 r90 top value="22 Ohms"
R510 "22R" 0603RESC1608X05N 49.5,102.625 r270 bottom value="22 Ohms"
R600 "40R2" 0402RESC1005X04N 23.25,71.166 r0 bottom value="40.2 Ohms"
R601 "40R2" 0402RESC1005X04N 23.25,58.217 r0 bottom value="40.2 Ohms"
R602 "40R2" 0402RESC1005X04N 23.25,72.246 r0 bottom value="40.2 Ohms"
R603 "40R2" 0402RESC1005X04N 23.25,74.405 r0 bottom value="40.2 Ohms"
R604 "40R2" 0402RESC1005X04N 23.25,55.856 r0 bottom value="40.2 Ohms"
R605 "40R2" 0402RESC1005X04N 23.25,79.776 r0 bottom value="40.2 Ohms"
R606 "40R2" 0402RESC1005X04N 23.25,59.297 r0 bottom value="40.2 Ohms"
R607 "40R2" 0402RESC1005X04N 23.25,78.696 r0 bottom value="40.2 Ohms"
R608 "40R2" 0402RESC1005X04N 23.25,60.376 r0 bottom value="40.2 Ohms"
R609 "40R2" 0402RESC1005X04N 23.25,77.617 r0 bottom value="40.2 Ohms"
R610 "40R2" 0402RESC1005X04N 23.25,66.959 r0 bottom value="40.2 Ohms"
R611 "40R2" 0402RESC1005X04N 23.25,61.456 r0 bottom value="40.2 Ohms"
R612 "40R2" 0402RESC1005X04N 23.25,53.697 r0 bottom value="40.2 Ohms"
R613 "40R2" 0402RESC1005X04N 23.25,73.325 r0 bottom value="40.2 Ohms"
R614 "40R2" 0402RESC1005X04N 23.25,64.8 r0 bottom value="40.2 Ohms"
R615 "40R2" 0402RESC1005X04N 23.25,80.855 r0 bottom value="40.2 Ohms"
R616 "40R2" 0402RESC1005X04N 23.25,54.776 r0 bottom value="40.2 Ohms"
R617 "40R2" 0402RESC1005X04N 23.25,65.88 r0 bottom value="40.2 Ohms"
R618 "40R2" 0402RESC1005X04N 23.25,85.018 r0 bottom value="40.2 Ohms"
R619 "40R2" 0402RESC1005X04N 23.25,87.177 r0 bottom value="40.2 Ohms"
R620 "40R2" 0402RESC1005X04N 23.25,86.098 r0 bottom value="40.2 Ohms"
R621 "40R2" 0402RESC1005X04N 23.25,83.939 r0 bottom value="40.2 Ohms"
R622 "40R2" 0402RESC1005X04N 23.25,68.039 r0 bottom value="40.2 Ohms"
R623 "40R2" 0402RESC1005X04N 23.25,52.617 r0 bottom value="40.2 Ohms"
R624 "80R" 0402RESC1005X04N 36.5,65.025 r0 bottom value="80 Ohms"
R625 "80R" 0402RESC1005X04N -0.426,-9.205 r90 bottom value="80 Ohms"
R626 "4k7" 0402RESC1005X04N 29.75,68.8 r270 bottom value="4.7 kOhms"
R627 "80R" 0402RESC1005X04N -2.85,-9.3 r270 top value="80 Ohms"
R700 "240R" 0402RESC1005X04N 34.875,64.7 r180 bottom value="240 Ohms"
R701 "240R" 0402RESC1005X04N 34.55,47.05 r90 bottom value="240 Ohms"
R800 "20k" 0402RESC1005X04N 41.1,89.729 r90 top value="20 kOhms"
R801 "20k" 0402RESC1005X04N 430.998,235.237 r90 top value="20 kOhms"
R802 "20k" 0402RESC1005X04N 391.296,235.487 r90 top value="20 kOhms"
R803 "20k" 0402RESC1005X04N 186.923,-12.95 r90 top value="20 kOhms"
R804 "20k" 0402RESC1005X04N 174.425,-12.95 r90 top value="20 kOhms"
R805 "20k" 0402RESC1005X04N 338.443,235.487 r90 top value="20 kOhms"
R806 "22R" 0603RESC1608X05N 54.35,71.775 r270 top value="22 Ohms"
R807 "20k" 0402RESC1005X04N 143.181,-12.95 r90 top value="20 kOhms"
R808 "20k" 0402RESC1005X04N 143.181,-12.95 r90 top value="20 kOhms"
R809 "22R" 0603RESC1608X05N 57.9,71.725 r270 top value="22 Ohms"
R810 "20k" 0402RESC1005X04N 269.815,235.362 r90 top value="20 kOhms"
R811 "22R" 0603RESC1608X05N 73.35,68.2 r180 top value="22 Ohms"
R812 "22R" 0603RESC1608X05N 76.2,66.425 r180 top value="22 Ohms"
R813 "22R" 0603RESC1608X05N 73.35,70 r180 top value="22 Ohms"
R814 "22R" 0603RESC1608X05N 73.325,73.575 r180 top value="22 Ohms"
R815 "22R" 0603RESC1608X05N 73.35,71.925 r180 top value="22 Ohms"
R816 "22R" 0603RESC1608X05N 76.125,64.375 r180 top value="22 Ohms"
R817 "22R" 0603RESC1608X05N 164.835,235.362 r90 top value="22 Ohms"
R818 "20k" 0402RESC1005X04N 58.775,83.15 r180 top value="20 kOhms"
R819 "1k" 0402RESC1005X04N 122.45,60.875 r90 top value="1 kOhms"
R820 "10k" 0603RESC1608X05N 120.1,65.95 r180 top value="10 kOhms"
R821 "10k" 0603RESC1608X05N 88.275,55.475 r180 top value="10 kOhms"
R822 "10k" 0603RESC1608X05N 102.375,55.65 r180 top value="10 kOhms"
R823 "10k" 0603RESC1608X05N 97.05,55.375 r0 top value="10 kOhms"
R824 "10k" 0603RESC1608X05N 113.625,55.8 r0 top value="10 kOhms"
R900 "20k" 0402RESC1005X04N 65.275,90.1 r180 bottom value="20 kOhms"
R901 "20k" 0402RESC1005X04N 65.275,91.425 r180 bottom value="20 kOhms"
R902 "20k" 0402RESC1005X04N 62.4,77.275 r180 top value="20 kOhms"
R903 "20k" 0402RESC1005X04N 62.4,80.15 r180 top value="20 kOhms"
R904 "20k" 0402RESC1005X04N 62.4,79.192 r180 top value="20 kOhms"
R905 "20k" 0402RESC1005X04N 62.4,78.233 r180 top value="20 kOhms"